# Altium PCB 2015_IHM.PcbDoc
Units mil, origin at the board's own origin, x right, y up, seen from the top; angles counter-clockwise.
Board outline 3543.31 x 2165.35 mil, 4 copper layers (1-TOP, 2-GND, 3-SIGNAL, 4-BOT); 228 components, 141 nets, 804 pads, 90 vias.
Unrouted connection lines stored in the file: 465.
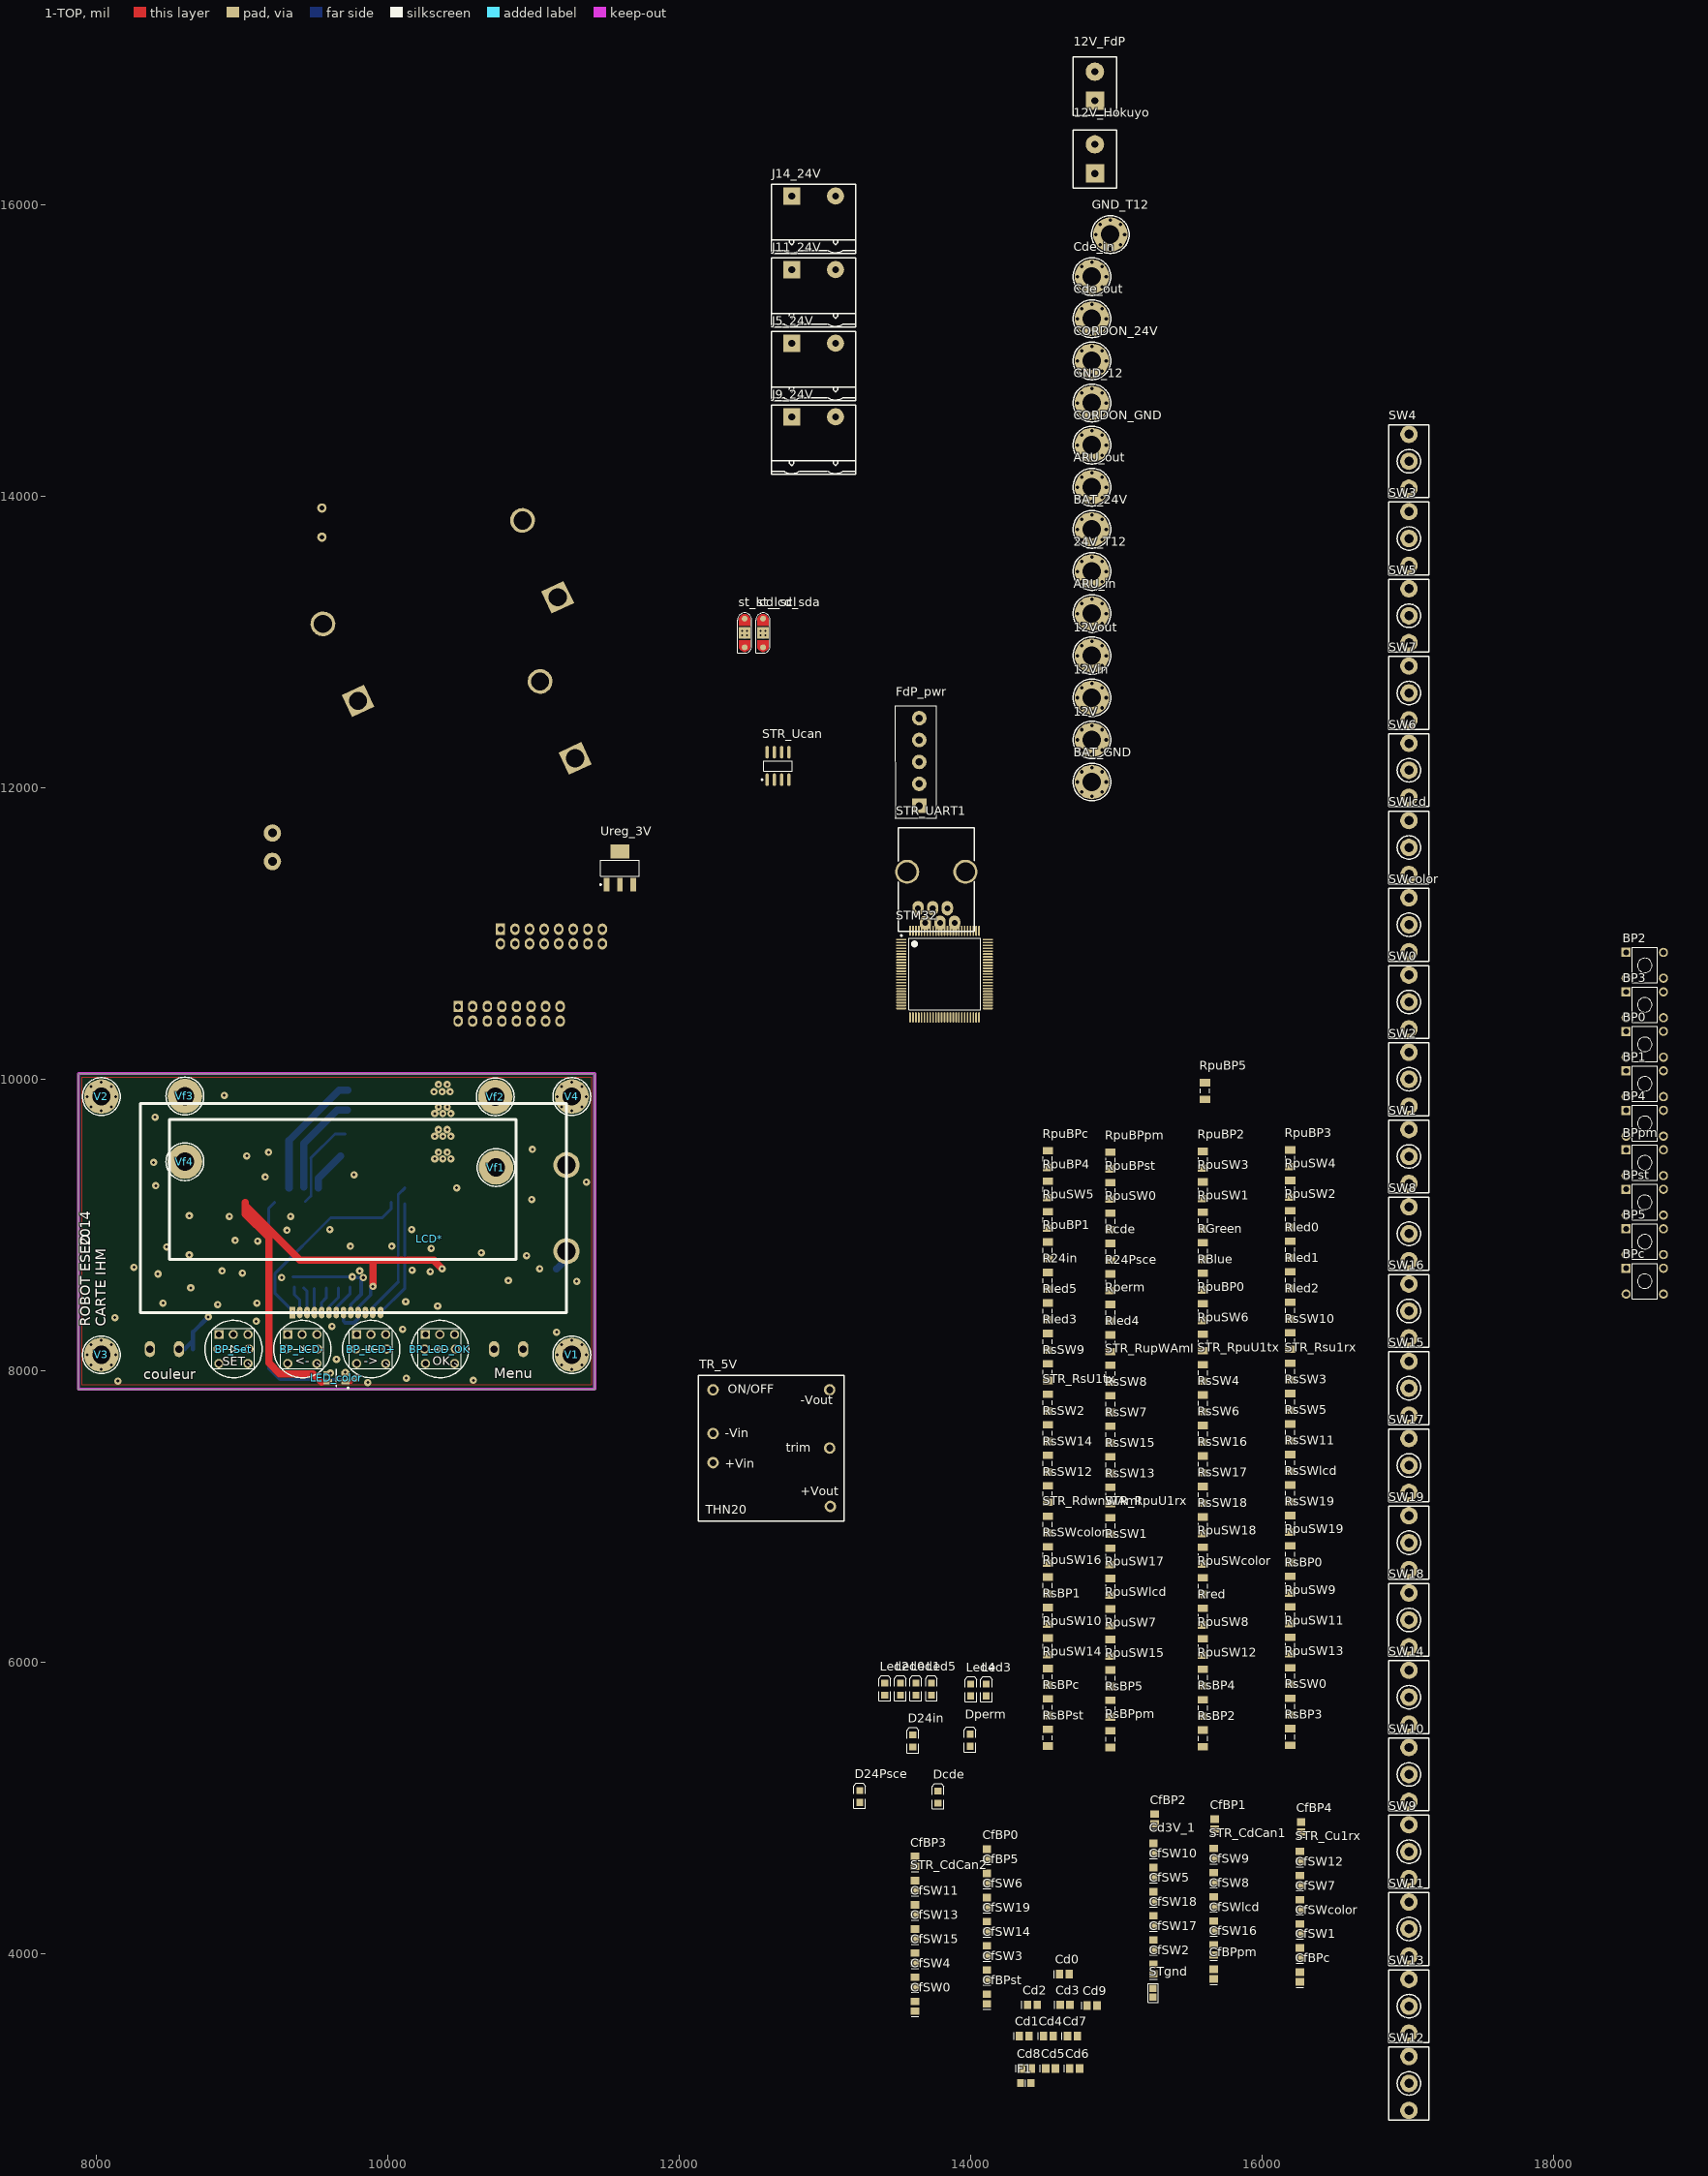
[diagram p0: 1-TOP view]
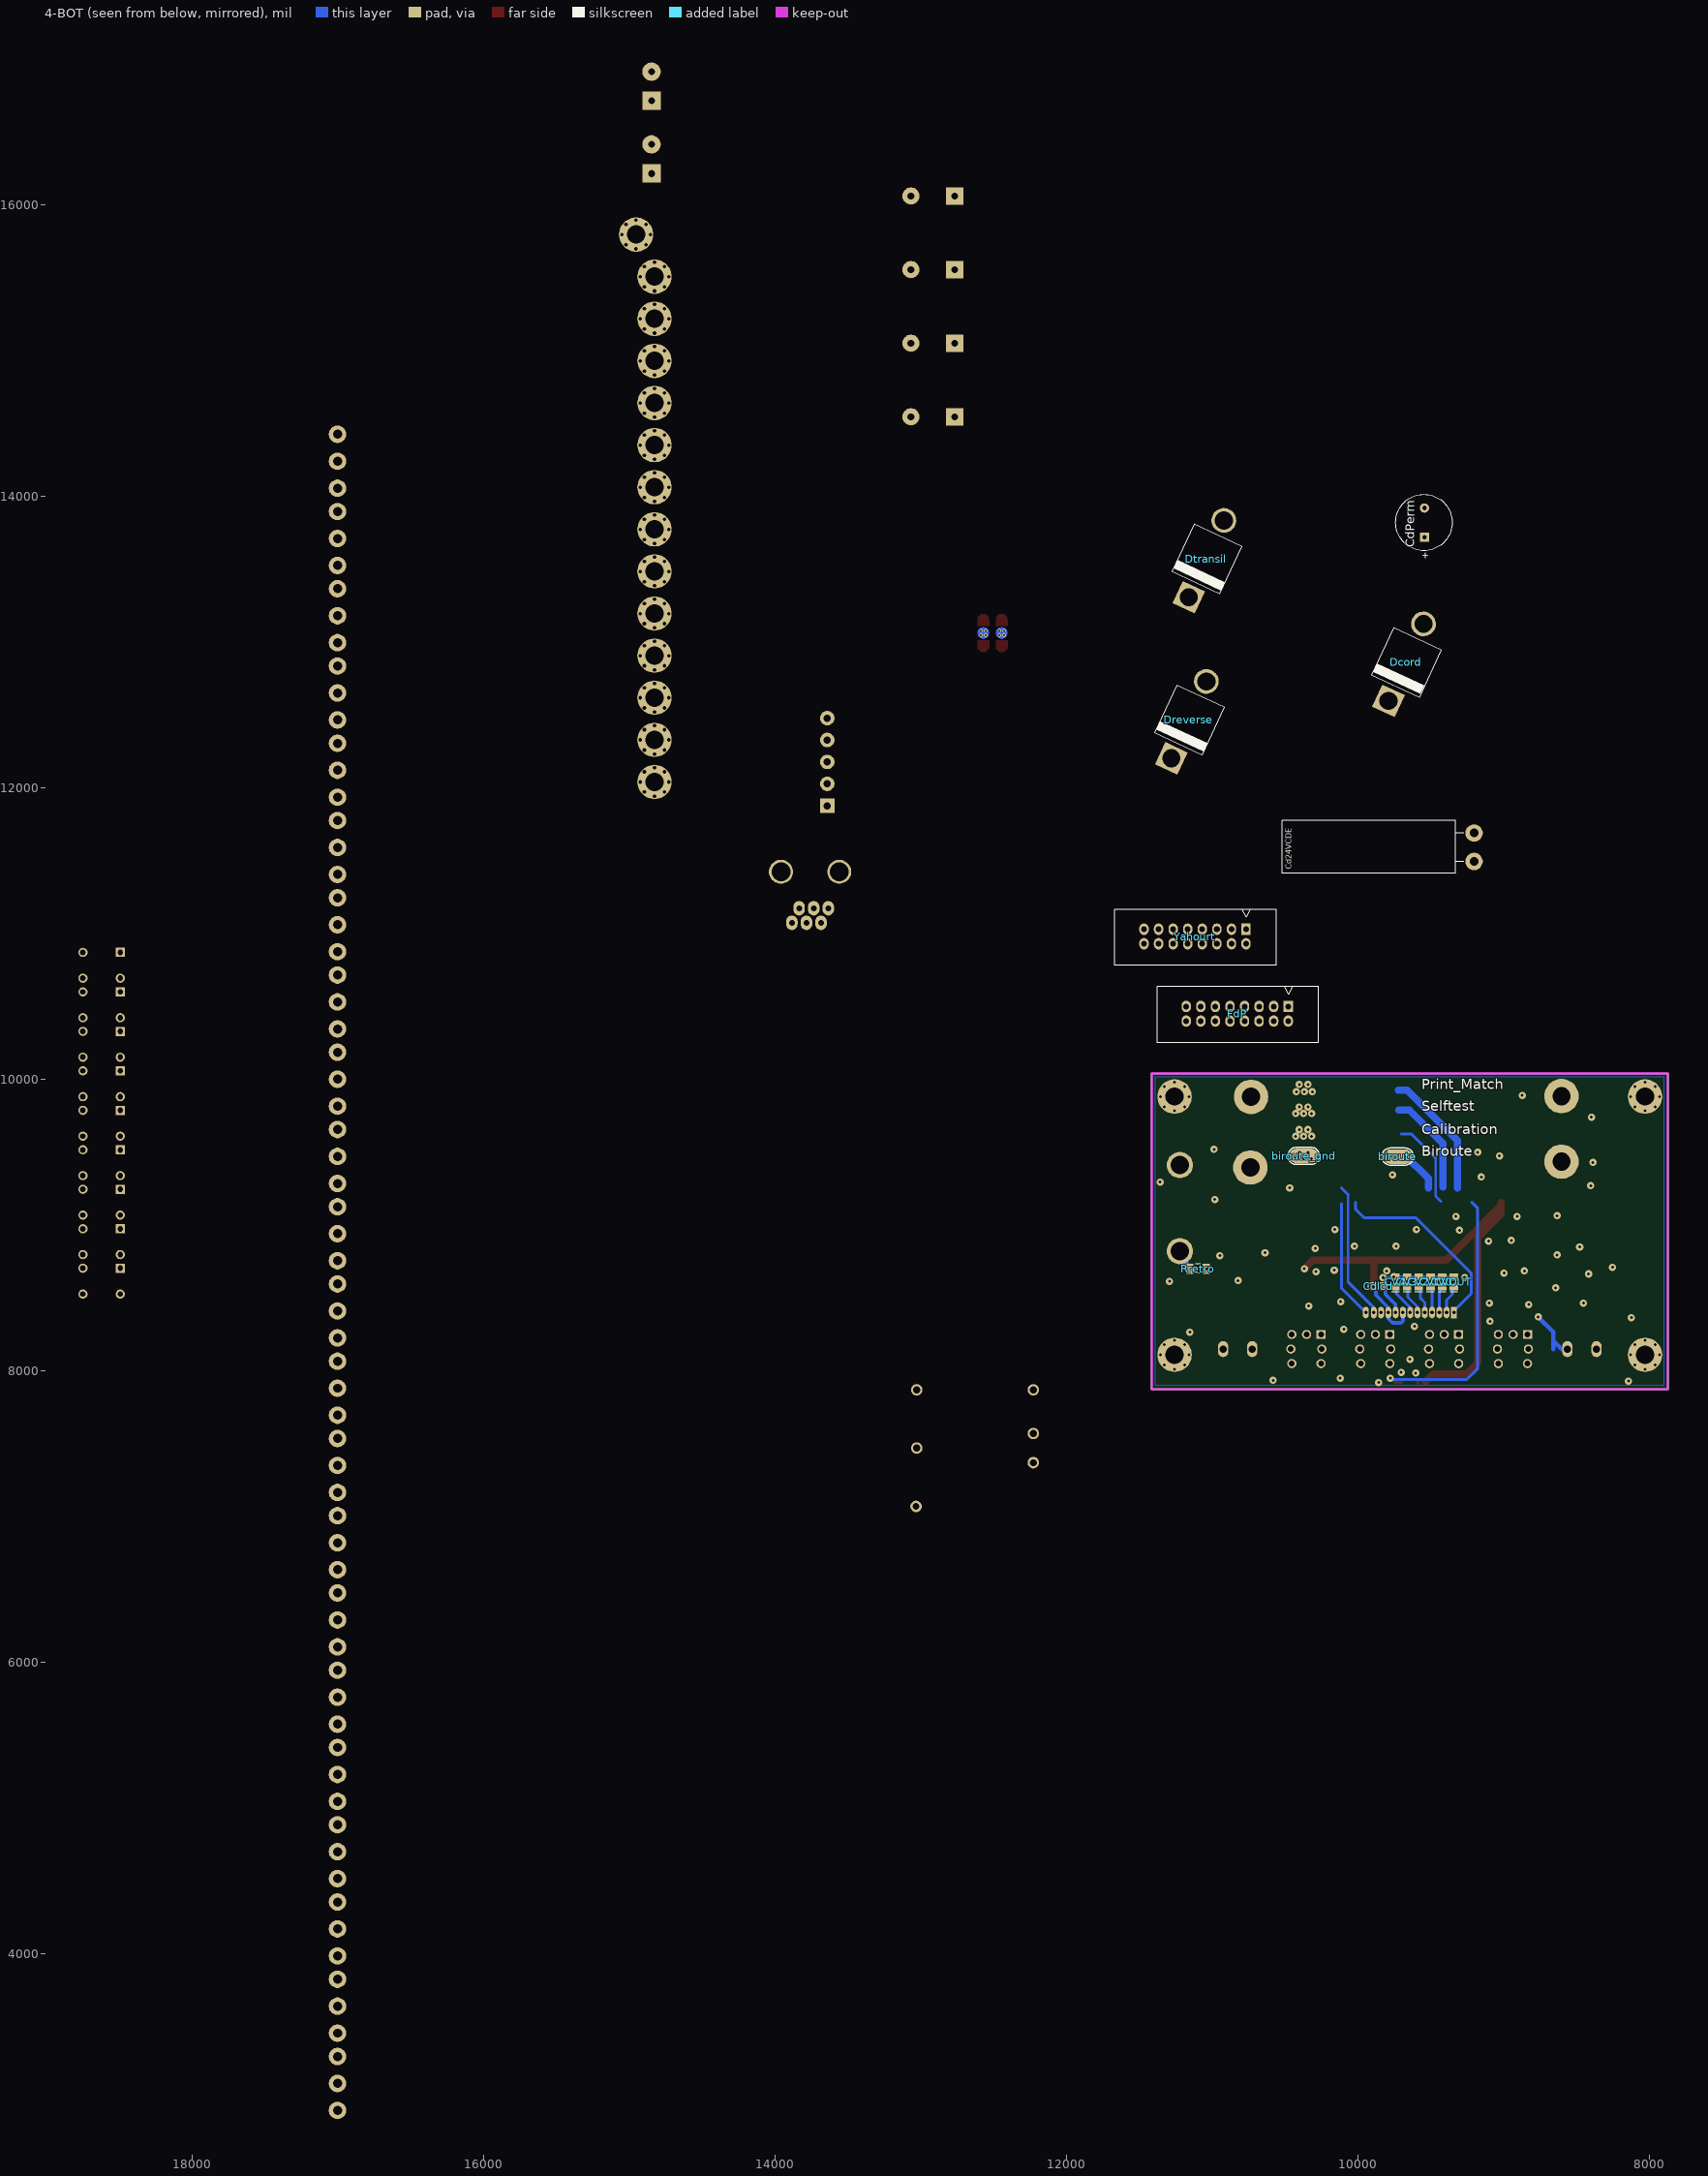
[diagram p1: 4-BOT view, seen from below]
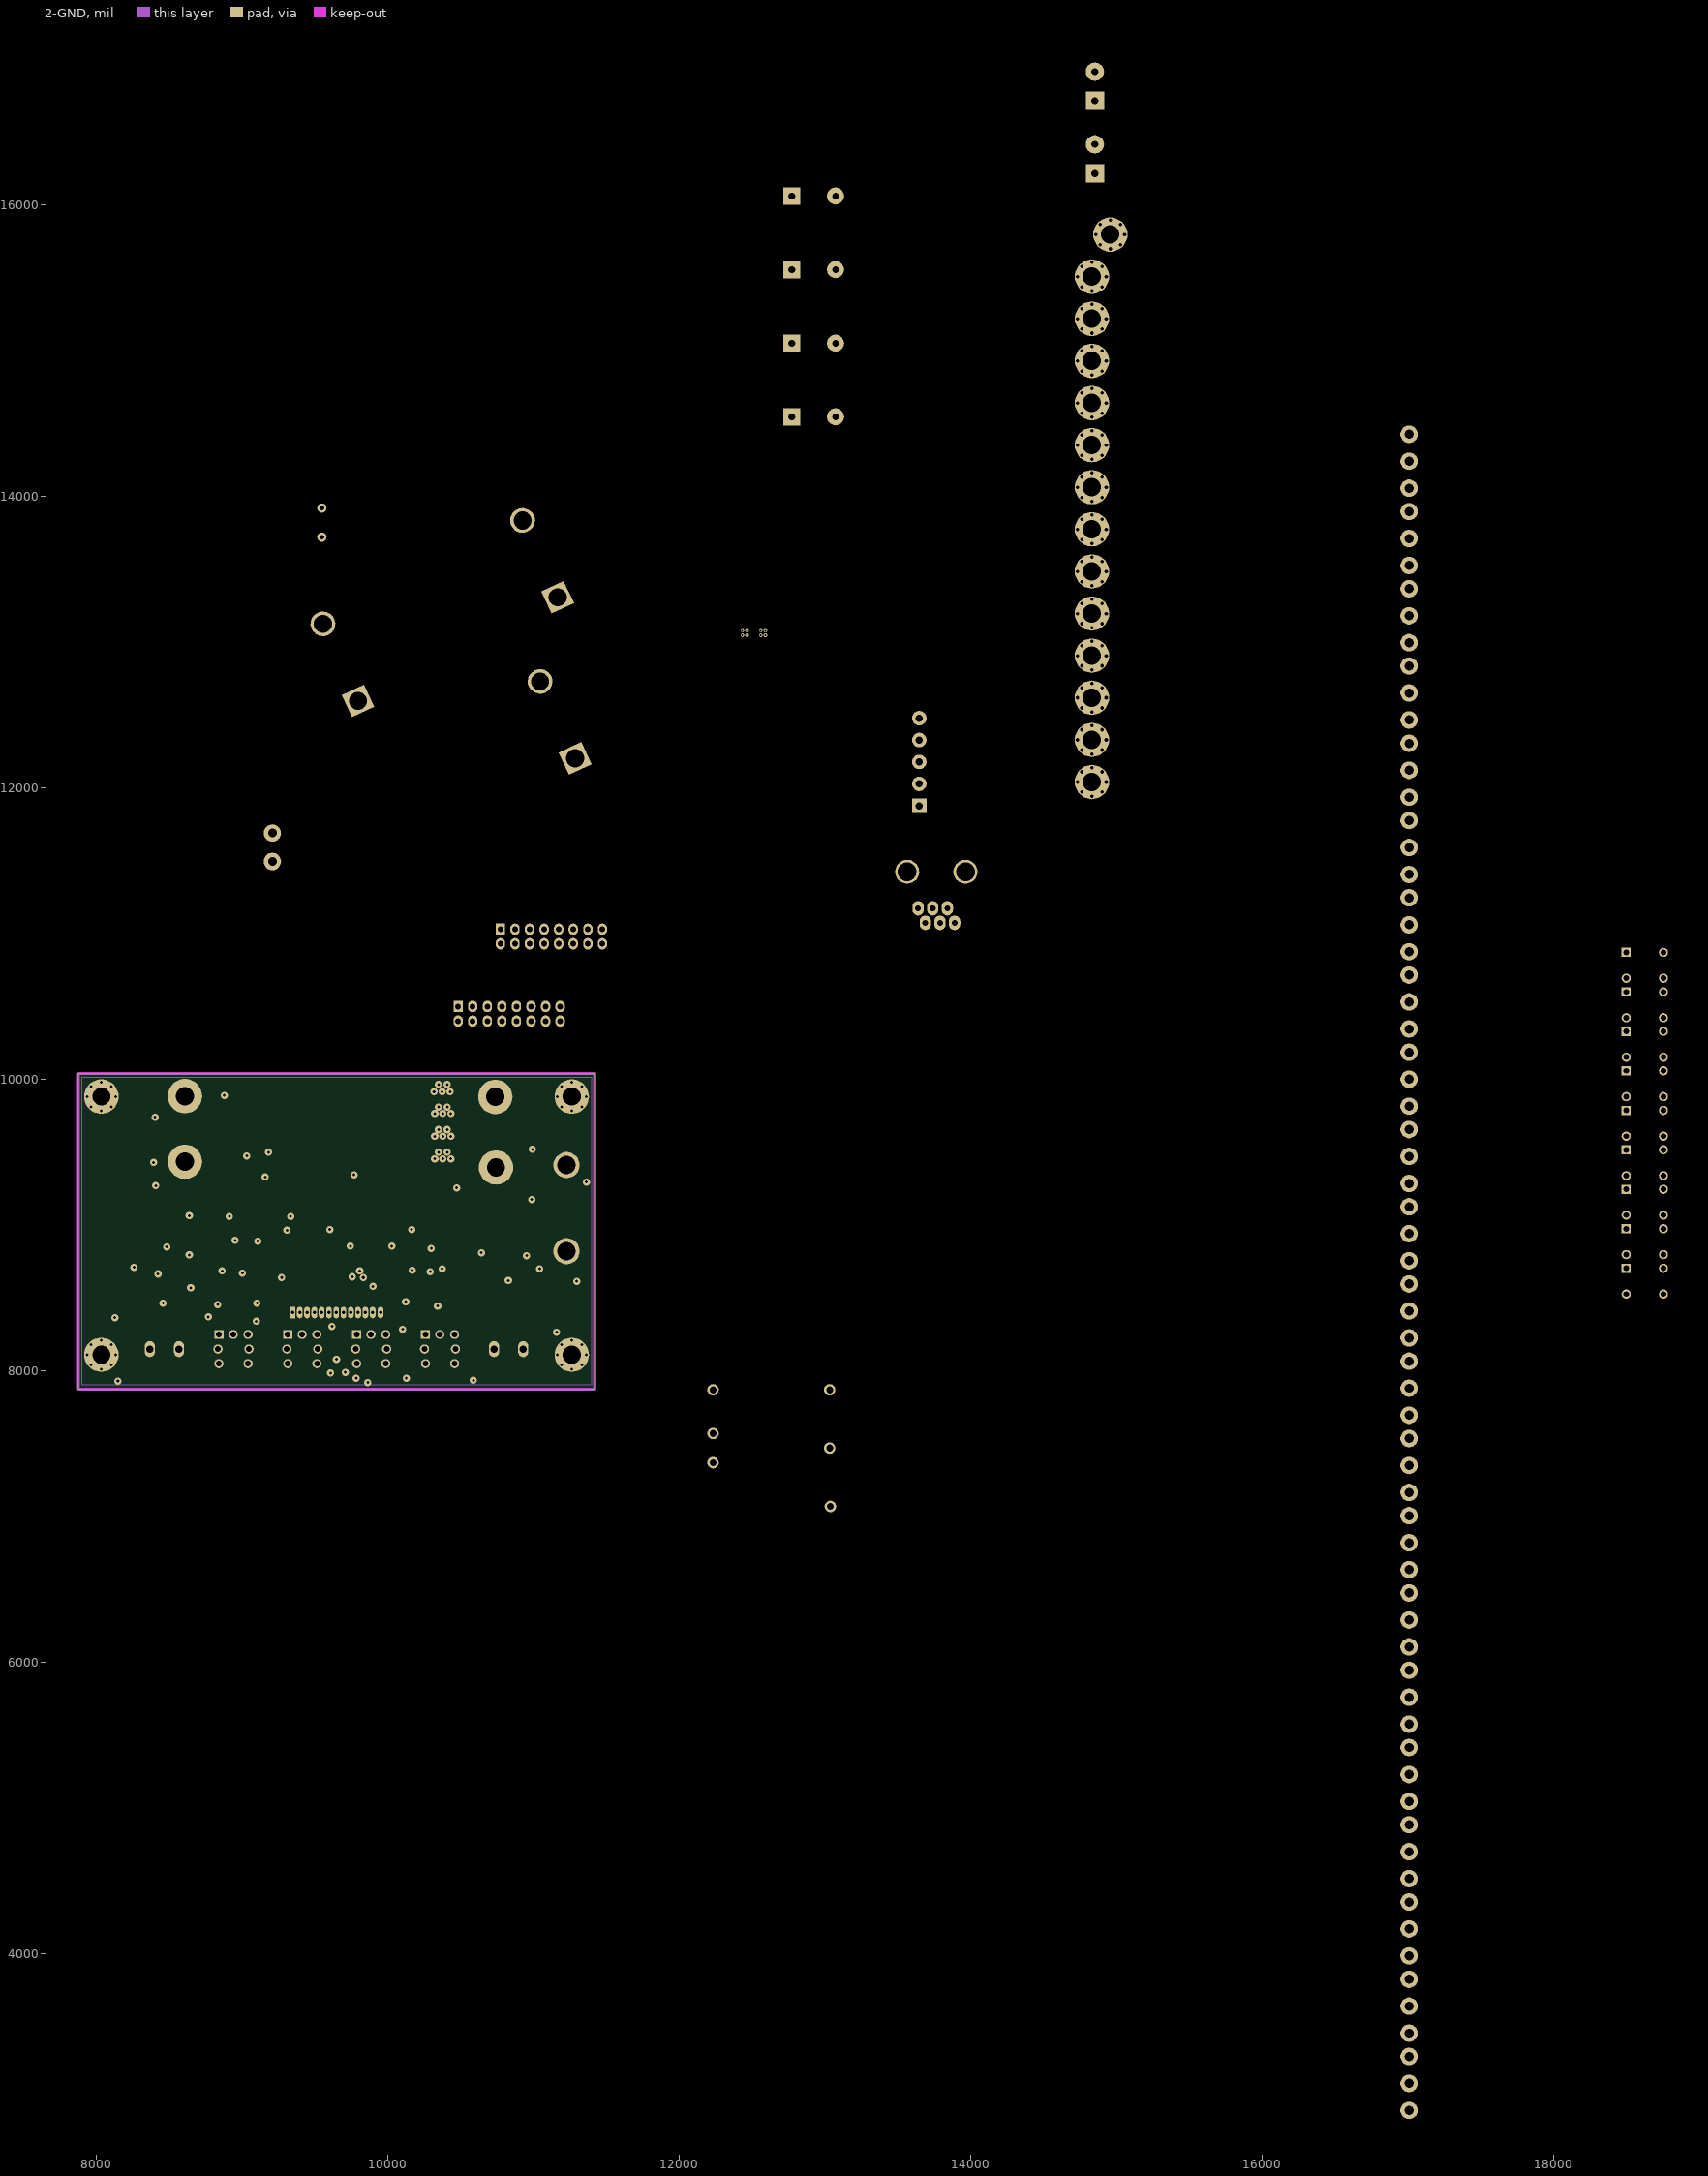
[diagram p2: 2-GND]
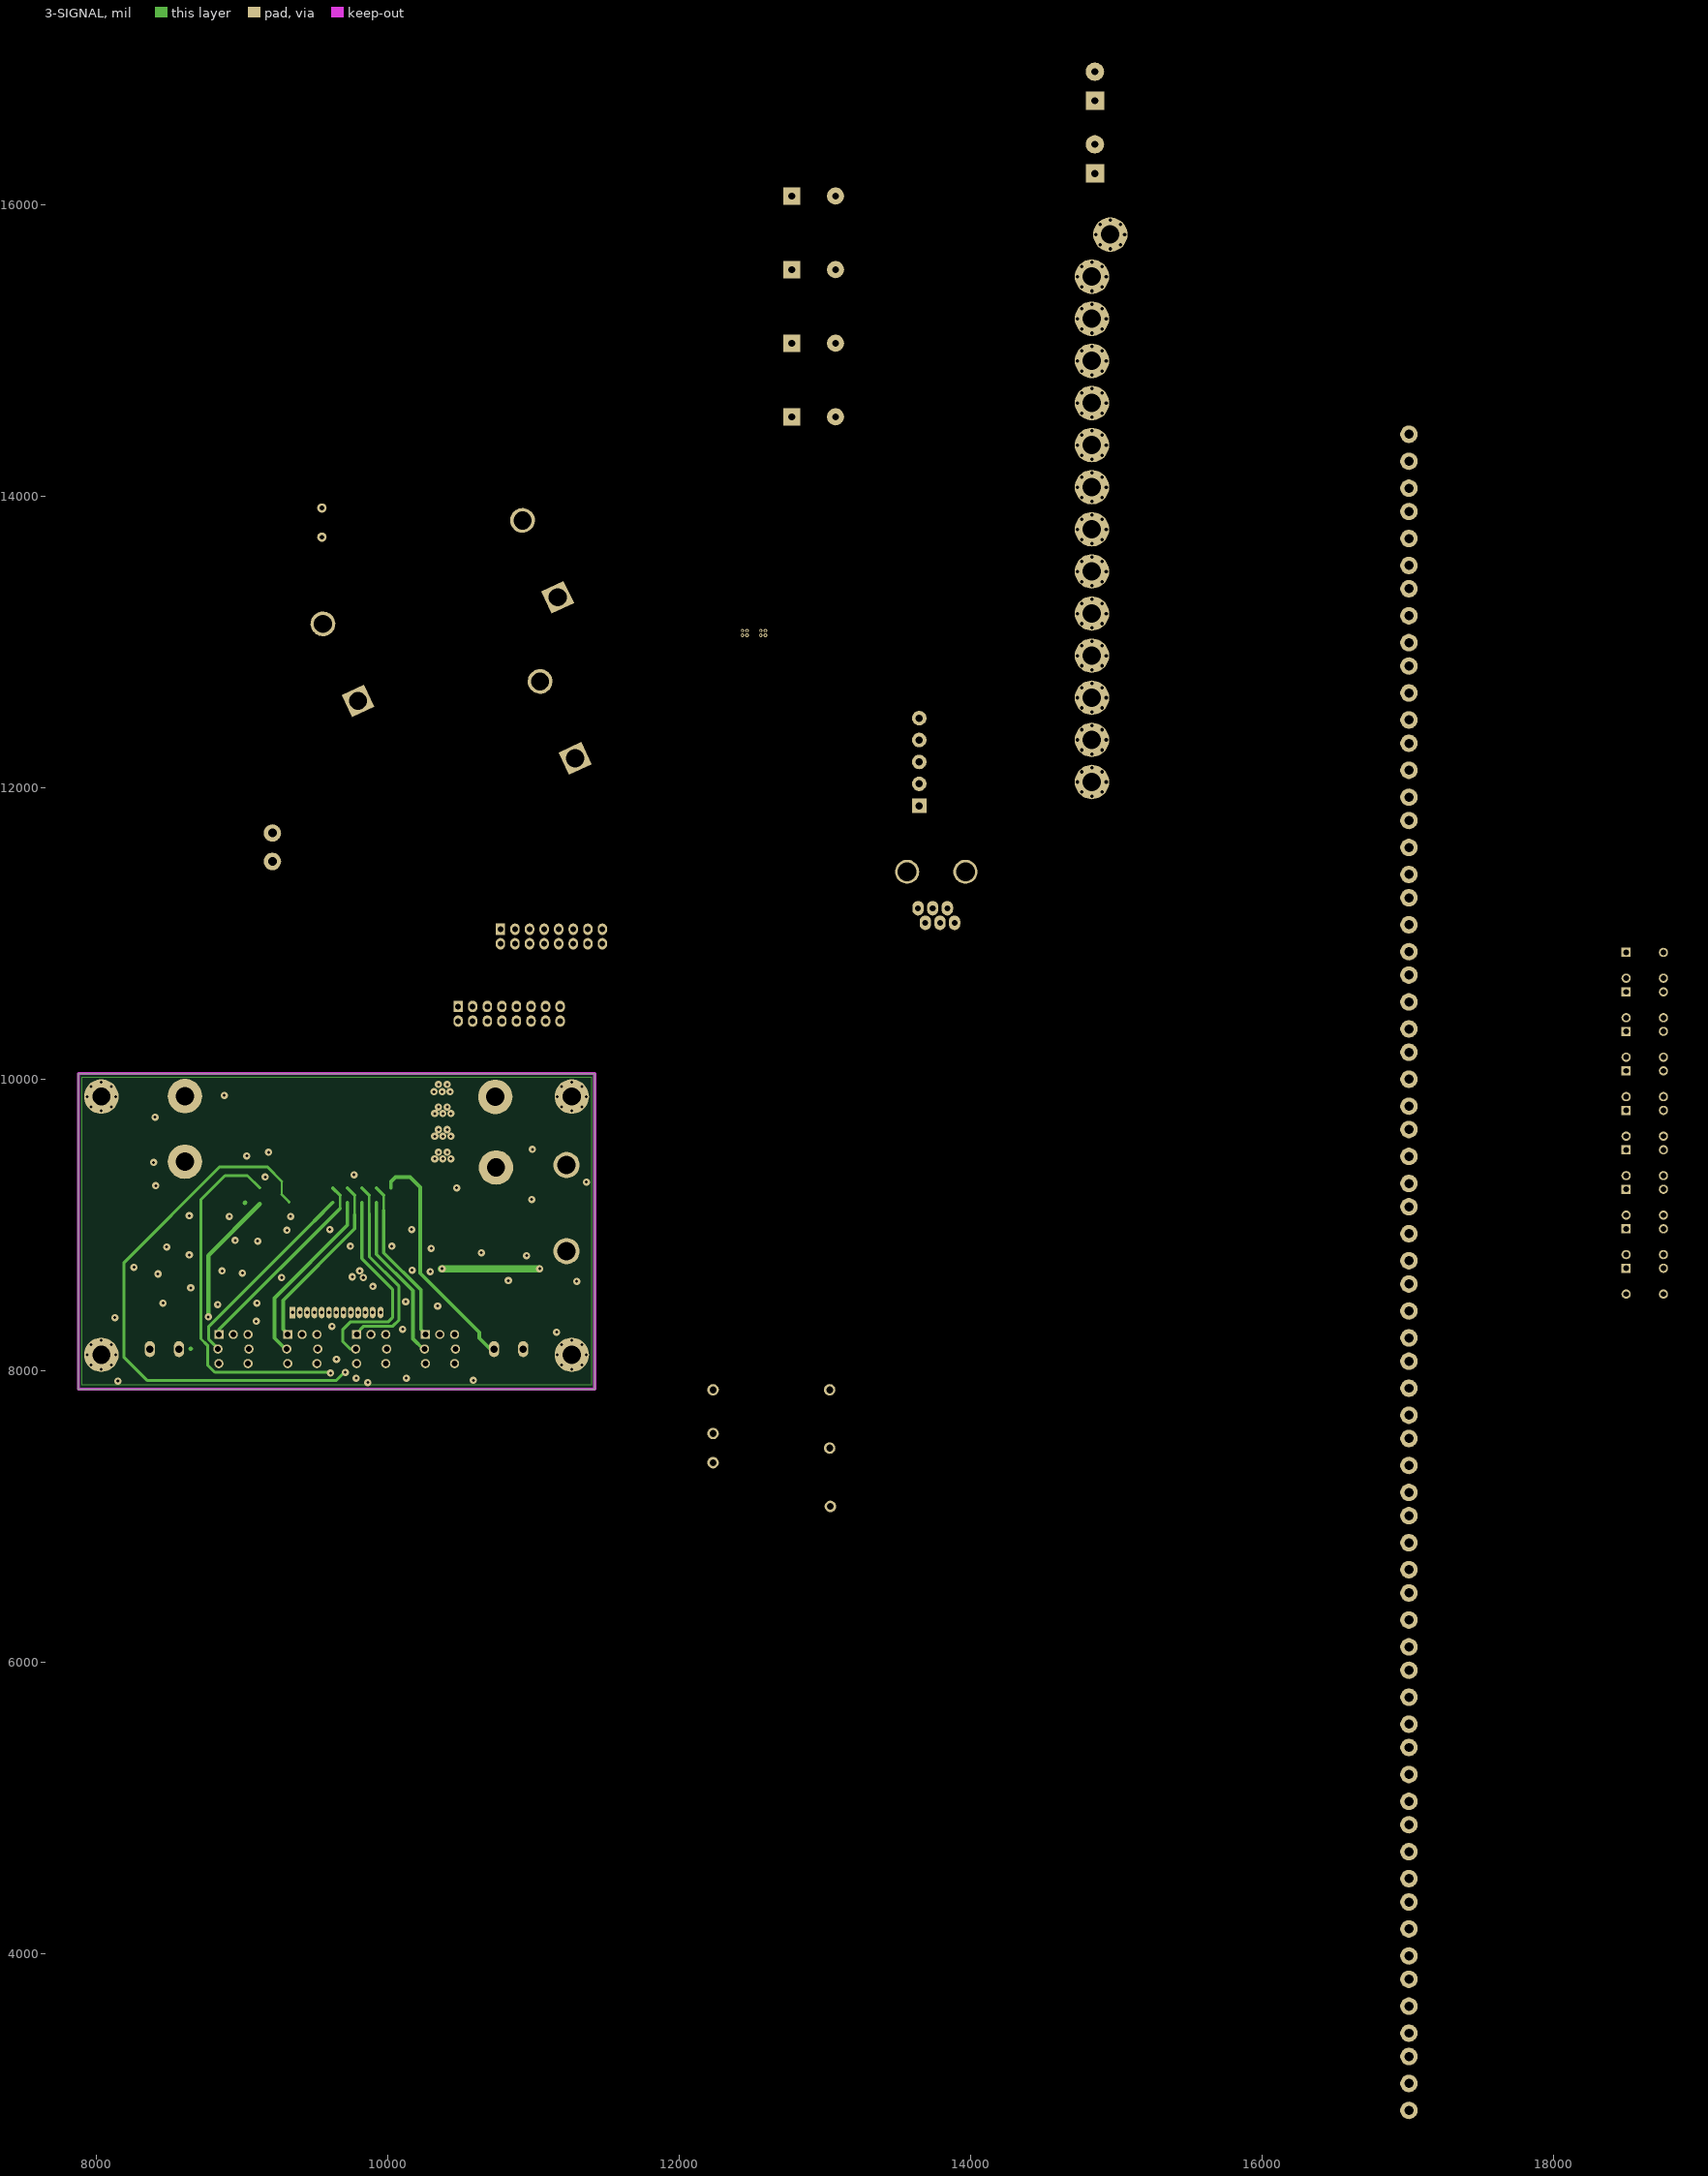
[diagram p3: 3-SIGNAL]

## Layer stack, top to bottom
Top Solder: solder mask 0.4, Solder Resist, Dk 3.5
1-TOP: signal copper 1.4
Dielectric1: core 12.6, FR-4, Dk 4.8
2-GND: signal copper 1.4
Dielectric2: prepreg 12.6, FR-4, Dk 4.8
3-SIGNAL: signal copper 1.4
Dielectric3: core 12.6, FR-4, Dk 4.8
4-BOT: signal copper 1.4
Bottom Solder: solder mask 0.4, Solder Resist, Dk 3.5

## Board outline
7874.02,7874.02 11417.32,7874.02 11417.32,10039.37 7874.02,10039.37

## Design rules (kind name [scope] priority, off if disabled: settings)
Clearance Clearance_1 [InNamedPolygon('2-GND') Or  InNamedPolygon('3-GND') Or  InNamedPolygon('1-GND') Or  InNamedPolygon('4-GND')] p1: gap=10
Clearance [All] p2: gap=8
FabricationTestpoint [(IsPad And (OnTopLayer Or OnBottomLayer))] p1: side=3 testpointundercomponent=TRUE minsize=40 maxsize=100 preferedsize=60 minholesize=0 maxholesize=40 preferedholesize=32 testpointgrid=1 allowsidetop=TRUE allowsidebottom=TRUE usegrid=TRUE gridtolerance=0.01
HoleSize [All] p1: absolutevalues=TRUE maxlimit=200 minlimit=1 maxpercent=80.000 minpercent=20.000
PlaneConnect [All] p1: planeconnectstyle=Direct reliefexpansion=20 reliefentries=4 reliefconductorwidth=10 reliefairgap=10
PolygonConnect [All] p1: connectstyle=Direct reliefconductorwidth=10 reliefentries=4 polygonreliefangle="90 Angle" airgapwidth=10
RoomDefinition 2015_IHM [InComponentClass('2015_IHM')] p1: confinementstyle=ConfineIn formatcopy=TRUE lockcomponents=FALSE outline 12644.37,8475 12114.37,8475 12114.37,9025 12644.37,9025
RoutingVias [All] p1: holewidth=28 width=50 viastyle="Through Hole" minholewidth=28 minwidth=50 maxholewidth=28 maxwidth=50
SilkToSolderMaskClearance SilkscreenOverComponentPads [IsPad] p1: minsilkscreentomaskgap=10 clearancetoexposedcopper=TRUE
SolderMaskExpansion [All] p1: expansion=4
Width [All] p1: maxlimit=200 minlimit=10 preferedwidth=15
25 further rules are at their usual default settings.

## Components (designator, comment, footprint, x,y, rotation, side; value= is the part's Value field where it differs from the comment)
12V "Pad_M3" M3x6mm#1 14828.83,12329.25 r0 top
12V_FdP "BORNIER2" BORNIER2 14849.37,16713.76 r90 top
12V_Hokuyo "BORNIER2" BORNIER2 14849.37,16215.02 r90 top
12Vin "Pad_M3" M3x6mm#1 14828.83,12618.17 r0 top
12Vout "Pad_M3" M3x6mm#1 14828.83,12907.09 r0 top
24V_T12 "Pad_M3" M3x6mm#1 14828.83,13484.92 r90 top
ARU_in "Pad_M3" M3x6mm#1 14828.83,13196 r0 top
ARU_out "Pad_M3" M3x6mm#1 14828.83,14062.75 r90 top
BAT_24V "Pad_M3" M3x6mm#1 14828.83,13773.84 r90 top
BAT_GND "Pad_M3" M3x6mm#1 14828.83,12040.34 r90 top
biroute "Pad_M3" PAD_CMS_5.08x2.54 9728.37,9470 r0 bottom
biroute_gnd "Pad_M3" PAD_CMS_5.08x2.54 10373.37,9475 r0 bottom
BP0 "BP?" "Switch 6x6 Vertical" 18494.87,10329.24 r0 top
BP1 "BP?" "Switch 6x6 Vertical" 18494.87,10058.36 r0 top
BP2 "BP?" "Switch 6x6 Vertical" 18494.87,10870.99 r0 top
BP3 "BP?" "Switch 6x6 Vertical" 18494.87,10600.11 r0 top
BP4 "BP?" "Switch 6x6 Vertical" 18494.87,9787.49 r0 top
BP5 "BP?" "Switch 6x6 Vertical" 18494.87,8974.87 r0 top
BP_LCD+ "pushbutton_led" PUSHBUTTON_LED_FlecheDroite 9783.07,8249.61 r0 top
BP_LCD- "pushbutton_led" PUSHBUTTON_LED_FlecheGauche 9310.63,8249.61 r0 top
BP_LCD_OK "pushbutton_led" PUSHBUTTON_LED_OK 10255.51,8249.61 r0 top
BP_Set "pushbutton_led" PUSHBUTTON_LED_SET 8838.19,8249.61 r0 top
BPc "BP?" "Switch 6x6 Vertical" 18494.87,8703.99 r0 top
BPpm "BP?" "Switch 6x6 Vertical" 18494.87,9516.62 r0 top
BPst "BP?" "Switch 6x6 Vertical" 18494.87,9245.74 r0 top
Cd0 "100nF" C0805_N 14640,3860 r0 top
Cd1 "100nF" C0805_N 14364.17,3436.42 r0 top
Cd2 "100nF" C0805_N 14420,3650 r0 top
Cd3 "100nF" C0805_N 14645,3650 r0 top
Cd3V_1 "4.7u" C0805_N 15251.06,4724.25 r90 top
Cd4 "100nF" C0805_N 14529.84,3436.42 r0 top
Cd5 "1nF" C0805_N 14544.84,3213.74 r0 top
Cd6 "1nF" C0805_N 14710.51,3213.74 r0 top
Cd7 "1nF" C0805_N 14695.51,3436.42 r0 top
Cd8 "1nF" C0805_N 14379.17,3213.74 r0 top
Cd9 "1nF" C0805_N 14830,3645 r0 top
Cd24VCDE "1000uF" RESISTANCE_5W 9205,11590 r0 bottom
Cde_in "Pad_M3" M3x6mm#1 14828.83,15507.34 r0 top
Cde_out "Pad_M3" M3x6mm#1 14828.83,15218.42 r90 top
Cdlcd "10uF" C0805_N 9859.37,8580 r180 bottom
CdPerm "100uF" CONDENSATEUR_POLARISE_ELECTROLYTIQUE_RADIAL_5.08/8.9 9545,13720 r90 bottom
CfBP0 "100nF" C0805_N 14108.39,4684.25 r90 top
CfBP1 "100nF" C0805_N 15671.61,4890.36 r90 top
CfBP2 "100nF" C0805_N 15258.94,4925.36 r90 top
CfBP3 "100nF" C0805_N 13615.71,4634.25 r90 top
CfBP4 "100nF" C0805_N 16264.29,4870.36 r90 top
CfBP5 "100nF" C0805_N 14108.39,4518.58 r90 top
CfBPc "100nF" C0805_N 16256.42,3840.91 r90 top
CfBPpm "100nF" C0805_N 15663.74,3860.91 r90 top
CfBPst "100nF" C0805_N 14108.39,3690.24 r90 top
CfSW0 "100nF" C0805_N 13615.71,3640.24 r90 top
CfSW1 "100nF" C0805_N 16256.42,4006.58 r90 top
CfSW2 "100nF" C0805_N 15251.06,3895.91 r90 top
CfSW3 "100nF" C0805_N 14108.39,3855.91 r90 top
CfSW4 "100nF" C0805_N 13615.71,3805.91 r90 top
CfSW5 "100nF" C0805_N 15251.06,4392.91 r90 top
CfSW6 "100nF" C0805_N 14108.39,4352.91 r90 top
CfSW7 "100nF" C0805_N 16256.42,4337.91 r90 top
CfSW8 "100nF" C0805_N 15663.74,4357.91 r90 top
CfSW9 "100nF" C0805_N 15663.74,4523.58 r90 top
CfSW10 "100nF" C0805_N 15251.06,4558.58 r90 top
CfSW11 "100nF" C0805_N 13615.71,4302.91 r90 top
CfSW12 "100nF" C0805_N 16256.42,4503.58 r90 top
CfSW13 "100nF" C0805_N 13615.71,4137.24 r90 top
CfSW14 "100nF" C0805_N 14108.39,4021.58 r90 top
CfSW15 "100nF" C0805_N 13615.71,3971.58 r90 top
CfSW16 "100nF" C0805_N 15663.74,4026.58 r90 top
CfSW17 "100nF" C0805_N 15251.06,4061.58 r90 top
CfSW18 "100nF" C0805_N 15251.06,4227.24 r90 top
CfSW19 "100nF" C0805_N 14108.39,4187.24 r90 top
CfSWcolor "100nF" C0805_N 16256.42,4172.24 r90 top
CfSWlcd "100nF" C0805_N 15663.74,4192.24 r90 top
CORDON_24V "Pad_M3" M3x6mm#1 14828.83,14929.5 r90 top
CORDON_GND "Pad_M3" M3x6mm#1 14828.83,14351.67 r90 top
CV0 "1uF" C0805_N 9424.37,8610 r90 bottom
CV1 "1uF" C0805_N 9504.37,8610 r90 bottom
CV2 "1uF" C0805_N 9584.37,8610 r90 bottom
CV3 "1uF" C0805_N 9664.37,8610 r90 bottom
CV4 "1uF" C0805_N 9744.37,8610 r90 bottom
CVOUT "1uF" C0805_N 9344.37,8610 r90 bottom
D24in "LED" LED_0805 13600,5460 r90 top
D24Psce "LED" LED_0805 13235,5080 r90 top
Dcde "LED" LED_0805 13772.68,5074.76 r90 top
Dcord "Diode" DIO10.46-5.3x2.8 9670,12860 r295 bottom
Dperm "LED" LED_0805 13992.52,5465.87 r90 top
Dreverse "Diode 1N4001" DIO10.46-5.3x2.8 11160,12465 r295 bottom (schematic designator Dcord)
Dtransil "BZW50-12B" DIO10.46-5.3x2.8 11040,13570 r295 bottom (schematic designator Dcord)
F1 "Fusible_1A_Fast" R0805_N 14375.24,3113.03 r0 top
FdP "BARRETTE_8 CONTACTS_2 RANGEES_MALE_DROITE" "HE10/16_M_D_B P" 10480,10400 r0 bottom (schematic designator COMRF)
FdP_pwr "BORNIER_5V_3.81MM" BORNIER_5V_3.81MM 13643.82,11877.92 r90 top
GND_12 "Pad_M3" M3x6mm#1 14828.83,14640.59 r0 top
GND_T12 "Pad_M3" M3x6mm#1 14955.13,15796.25 r90 top
J5_24V "0 - 24V" BORNIER2_FEM_COUDE 12769.37,15050.87 r0 top
J9_24V "0 - 24V" BORNIER2_FEM_COUDE 12769.37,14545.87 r0 top
J11_24V "0 - 24V" BORNIER2_FEM_COUDE 12769.37,15555.87 r0 top
J14_24V "0 - 24V" BORNIER2_FEM_COUDE 12769.37,16060.87 r0 top
LCD* "MCCOG42005A6W-BNMLWI" LCD_4X20_MIDAS 8298.82,8400 r0 top locked
Led0 "LED" LED_0805 13514.29,5816.97 r90 top
Led1 "LED" LED_0805 13620.91,5816.97 r90 top
Led2 "LED" LED_0805 13407.68,5816.97 r90 top
Led3 "LED" LED_0805 14104.29,5810.87 r90 top
Led4 "LED" LED_0805 13997.68,5810.87 r90 top
Led5 "LED" LED_0805 13727.52,5816.97 r90 top
LED_color "150141M173100" 3528 9645.67,7952.76 r180 top
R24in "4.7k" R1206_N 14526.61,8617.56 r90 top
R24Psce "4.7k" R1206_N 14956.1,8607.56 r90 top
RBlue "150" R1206_N 15590.59,8612.56 r90 top
Rcde "1k" R1206_N 14956.1,8816.54 r90 top
RGreen "150" R1206_N 15590.59,8821.54 r90 top
Rled0 "150" R1206_N 16190.08,8831.54 r90 top
Rled1 "150" R1206_N 16190.08,8622.56 r90 top
Rled2 "150" R1206_N 16190.08,8413.58 r90 top
Rled3 "150" R1206_N 14526.61,8199.61 r90 top
Rled4 "150" R1206_N 14956.1,8189.61 r90 top
Rled5 "150" R1206_N 14526.61,8408.58 r90 top
Rperm "1k" R1206_N 14956.1,8398.58 r90 top
RpuBP0 "100K" R1206_N 15590.59,8403.58 r90 top
RpuBP1 "100K" R1206_N 14526.61,8826.54 r90 top
RpuBP2 "100K" R1206_N 15590.59,9448.47 r90 top
RpuBP3 "100K" R1206_N 16190.08,9458.47 r90 top
RpuBP4 "100K" R1206_N 14526.61,9244.49 r90 top
RpuBP5 "100K" R1206_N 15605,9920 r90 top
RpuBPc "100K" R1206_N 14526.61,9453.47 r90 top
RpuBPpm "100K" R1206_N 14956.1,9443.47 r90 top
RpuBPst "100K" R1206_N 14956.1,9234.49 r90 top
RpuSW0 "100K" R1206_N 14956.1,9025.51 r90 top
RpuSW1 "100K" R1206_N 15590.59,9030.51 r90 top
RpuSW2 "100K" R1206_N 16190.08,9040.51 r90 top
RpuSW3 "100K" R1206_N 15590.59,9239.49 r90 top
RpuSW4 "100K" R1206_N 16190.08,9249.49 r90 top
RpuSW5 "100K" R1206_N 14526.61,9035.51 r90 top
RpuSW6 "100K" R1206_N 15590.59,8194.61 r90 top
RpuSW7 "100K" R1206_N 14956.1,6099.84 r90 top
RpuSW8 "100K" R1206_N 15590.59,6104.84 r90 top
RpuSW9 "100K" R1206_N 16190.08,6323.82 r90 top
RpuSW10 "100K" R1206_N 14526.61,6109.84 r90 top
RpuSW11 "100K" R1206_N 16190.08,6114.84 r90 top
RpuSW12 "100K" R1206_N 15590.59,5895.87 r90 top
RpuSW13 "100K" R1206_N 16190.08,5905.87 r90 top
RpuSW14 "100K" R1206_N 14526.61,5900.87 r90 top
RpuSW15 "100K" R1206_N 14956.1,5890.87 r90 top
RpuSW16 "100K" R1206_N 14526.61,6527.8 r90 top
RpuSW17 "100K" R1206_N 14956.1,6517.8 r90 top
RpuSW18 "100K" R1206_N 15590.59,6731.77 r90 top
RpuSW19 "100K" R1206_N 16190.08,6741.77 r90 top
RpuSWcolor "100K" R1206_N 15590.59,6522.8 r90 top
RpuSWlcd "100K" R1206_N 14956.1,6308.82 r90 top
Rred "150" R1206_N 15590.59,6313.82 r90 top
Rretro "33R" R1206_N 11099.37,8700 r180 bottom
RsBP0 "1K" R1206_N 16190.08,6532.8 r90 top
RsBP1 "1K" R1206_N 14526.61,6318.82 r90 top
RsBP2 "1K" R1206_N 15590.59,5477.91 r90 top
RsBP3 "1K" R1206_N 16190.08,5487.91 r90 top
RsBP4 "1K" R1206_N 15590.59,5686.89 r90 top
RsBP5 "1K" R1206_N 14956.1,5681.89 r90 top
RsBPc "1K" R1206_N 14526.61,5691.89 r90 top
RsBPpm "1K" R1206_N 14956.1,5472.91 r90 top
RsBPst "1K" R1206_N 14526.61,5482.91 r90 top
RsSW0 "1K" R1206_N 16190.08,5696.89 r90 top
RsSW1 "1K" R1206_N 14956.1,6726.77 r90 top
RsSW2 "1K" R1206_N 14526.61,7572.68 r90 top
RsSW3 "1K" R1206_N 16190.08,7786.65 r90 top
RsSW4 "1K" R1206_N 15590.59,7776.65 r90 top
RsSW5 "1K" R1206_N 16190.08,7577.68 r90 top
RsSW6 "1K" R1206_N 15590.59,7567.68 r90 top
RsSW7 "1K" R1206_N 14956.1,7562.68 r90 top
RsSW8 "1K" R1206_N 14956.1,7771.65 r90 top
RsSW9 "1K" R1206_N 14526.61,7990.63 r90 top
RsSW10 "1K" R1206_N 16190.08,8204.61 r90 top
RsSW11 "1K" R1206_N 16190.08,7368.7 r90 top
RsSW12 "1K" R1206_N 14526.61,7154.73 r90 top
RsSW13 "1K" R1206_N 14956.1,7144.73 r90 top
RsSW14 "1K" R1206_N 14526.61,7363.7 r90 top
RsSW15 "1K" R1206_N 14956.1,7353.7 r90 top
RsSW16 "1K" R1206_N 15590.59,7358.7 r90 top
RsSW17 "1K" R1206_N 15590.59,7149.73 r90 top
RsSW18 "1K" R1206_N 15590.59,6940.75 r90 top
RsSW19 "1K" R1206_N 16190.08,6950.75 r90 top
RsSWcolor "1K" R1206_N 14526.61,6736.77 r90 top
RsSWlcd "1K" R1206_N 16190.08,7159.73 r90 top
st_lcd_scl "Goutte Strap_3" "Goutte Strap_3 PADS" 12446.06,13062.44 r90 top
st_lcd_sda "Goutte Strap_3" "Goutte Strap_3 PADS" 12572.36,13062.44 r90 top
STgnd "Goutte Strap_2" "Goutte Strap_2 Pads_Clearance 0.254mm" 15248.66,3702.17 r90 top
STM32 "STM32F407VGT6" STM-LQFP100_N 13817.87,10722.36 r0 top
STR_CdCan1 "100nF" C0805_N 15663.74,4689.25 r90 top
STR_CdCan2 "1µF" C0805_N 13615.71,4468.58 r90 top
STR_Cu1rx "100pF" C0805_N 16256.42,4669.25 r90 top
STR_RdwnWAmI "0" R1206_N 14526.61,6945.75 r90 top
STR_RpuU1rx "10k" R1206_N 14956.1,6935.75 r90 top
STR_RpuU1tx "1M" R1206_N 15590.59,7985.63 r90 top
STR_Rsu1rx "1k" R1206_N 16190.08,7995.63 r90 top
STR_RsU1tx "100" R1206_N 14526.61,7781.65 r90 top
STR_RupWAmI "0" R1206_N 14956.1,7980.63 r90 top
STR_UART1 "RJ11_6/6" RJ11_6/6 13686.24,11074.17 r90 top
STR_Ucan "MCP2551-I/SN" SO8_N 12675,12150 r90 top
SW0 "25436NAH" "SW_UNIPOL_DROIT - APEM 18235" 16864.37,10280.87 r0 top
SW1 "25436NAH" "SW_UNIPOL_DROIT - APEM 18235" 16864.37,9220.87 r0 top
SW2 "25436NAH" "SW_UNIPOL_DROIT - APEM 18235" 16864.37,9750.87 r0 top
SW3 "25436NAH" "SW_UNIPOL_DROIT - APEM 18235" 16864.37,13460.87 r0 top
SW4 "25436NAH" "SW_UNIPOL_DROIT - APEM 18235" 16864.37,13990.87 r0 top
SW5 "25436NAH" "SW_UNIPOL_DROIT - APEM 18235" 16864.37,12930.87 r0 top
SW6 "25436NAH" "SW_UNIPOL_DROIT - APEM 18235" 16864.37,11870.87 r0 top
SW7 "25436NAH" "SW_UNIPOL_DROIT - APEM 18235" 16864.37,12400.87 r0 top
SW8 "25436NAH" "SW_UNIPOL_DROIT - APEM 18235" 16864.37,8690.87 r0 top
SW9 "25436NAH" "SW_UNIPOL_DROIT - APEM 18235" 16864.37,4450.87 r0 top
SW10 "25436NAH" "SW_UNIPOL_DROIT - APEM 18235" 16864.37,4980.87 r0 top
SW11 "25436NAH" "SW_UNIPOL_DROIT - APEM 18235" 16864.37,3920.87 r0 top
SW12 "25436NAH" "SW_UNIPOL_DROIT - APEM 18235" 16864.37,2860.87 r0 top
SW13 "25436NAH" "SW_UNIPOL_DROIT - APEM 18235" 16864.37,3390.87 r0 top
SW14 "25436NAH" "SW_UNIPOL_DROIT - APEM 18235" 16864.37,5510.87 r0 top
SW15 "25436NAH" "SW_UNIPOL_DROIT - APEM 18235" 16864.37,7630.87 r0 top
SW16 "25436NAH" "SW_UNIPOL_DROIT - APEM 18235" 16864.37,8160.87 r0 top
SW17 "25436NAH" "SW_UNIPOL_DROIT - APEM 18235" 16864.37,7100.87 r0 top
SW18 "25436NAH" "SW_UNIPOL_DROIT - APEM 18235" 16864.37,6040.87 r0 top
SW19 "25436NAH" "SW_UNIPOL_DROIT - APEM 18235" 16864.37,6570.87 r0 top
SWcolor "25436NAH" "SW_UNIPOL_DROIT - APEM 18235" 16864.37,10810.87 r0 top
SWlcd "25436NAH" "SW_UNIPOL_DROIT - APEM 18235" 16864.37,11340.87 r0 top
TR_5V "TRACO THN 20-4811Wi" TRACO_THN20 12129.37,7970 r0 top
Ureg_3V "MCP1826S-3302E/DB" SOT223-4N 11590,11450 r90 top
V1 "Pad_M3" M3x6mm#2 11259.84,8110.24 r0 top locked
V2 "Pad_M3" M3x6mm#2 8031.5,9881.89 r0 top locked
V3 "Pad_M3" M3x6mm#2 8031.5,8110.24 r0 top locked
V4 "Pad_M3" M3x6mm#2 11259.84,9881.89 r0 top locked
Vf1 "Pad_M3" M3x6mm#3 10740,9395 r0 top
Vf2 "Pad_M3" M3x6mm#3 10735,9880 r0 top
Vf3 "Pad_M3" M3x6mm#3 8605,9885 r0 top
Vf4 "Pad_M3" M3x6mm#3 8605,9435 r0 top
Yahourt "BARRETTE_8 CONTACTS_2 RANGEES_MALE_DROITE" "HE10/16_M_D_B P" 10770,10930 r0 bottom (schematic designator COMRF)

## Footprints (in the part's own frame and the unit in brackets; to place one, negate y for a bottom-side part, rotate by r counter-clockwise, add the part's x,y. Pads: shape width x height; smd on the part's side, far side on the other; paste and mask are expansions set on the pad)
3528 [mm] "Chip LED, 4-Leads, Body 2.8x3.5mm (max), Pitch 1.42mm, IPC Medium Density"
  rect 1.5x0.9 smd: 1(1.55,0.707) 2(1.55,-0.71) 3(-1.55,0.707) 4(-1.55,-0.707)
  silkscreen extent -2.16,-1.5 0.03,1.9, body extent -1.75,-1.4 1.75,1.4, height 1.87
BORNIER2 [mm] "Connector; Header; 2 Position; screw terminal blocks, Pin Spacing=5.08mm"
  rect 3.2x3.2 hole 1.219: 1(0,0)
  round 3.2 hole 1.219: 2(5.08,0)
  silkscreen extent -2.54,-3.81 7.62,3.81, body extent -3.57,-4.8 8.59,3.8, height 12
BORNIER2_FEM_COUDE [mm] "Connector; Header; 2 Position; Right Angle; Female; Pin Spacing=5.08mm Green"
  rect 3x3 hole 1.219: 1(0,0)
  round 3 hole 1.219: 2(7.62,0)
  silkscreen extent -3.56,-10.03 11.18,2.03
BORNIER_5V_3.81MM [mm]
  rect 2.54x2.54 hole 1.25: 1(-0.025,0)
  round 2.54 hole 1.25: 2(3.81,0) 3(7.62,0) 4(11.43,0) 5(15.24,0)
  silkscreen extent -2.18,-3 17.37,4.2, body extent -2.6,-2.97 17.84,4.28, height 9.22
C0805_N [mm] "Chip Capacitor, Body 2.0x1.3mm, IPC Medium Density"
  rect 1.3x1.5 smd: 1(-0.85,0) 2(0.85,0)
  silkscreen extent -1.8,-0.65 -1.8,0.65, body extent -0.99,-0.63 1.01,0.63, height 0.8
CONDENSATEUR_POLARISE_ELECTROLYTIQUE_RADIAL_5.08/8.9 [mil] "CONDENSATEUR_POLARISE_ELECTROLYTIQUE_RADIAL ; DIAMETRE : 8.9mm ; ESPACEMENT BROCHES : 5.08mm"
  rect 64x64 / inner round 64 / far side round 64 hole 32: 1(0,0)
  round 64 hole 32: 2(200,0)
  silkscreen extent -93,-190 294,197, body extent -93,-188 291,196, height 485
DIO10.46-5.3x2.8 [mil] "Diode, Axial; Body 5.2 x 2.7 mm (LxDia. max), Lead Dia. 0.86 mm (max)"
  round 170 hole 125: 1(-290,-5)
  rect 170x170 hole 125: 2(290,0)
  silkscreen extent -180,-180 180,180
"Goutte Strap_2 Pads_Clearance 0.254mm" [mil] "Goutte Strap_2 Pads_Clearance 0.254mm"
  rect 50x50 smd mask+7.87: 1(0,0) 2(60,0)
  silkscreen extent -35,-35 95,35
"Goutte Strap_3 PADS" [mm] "3 Pads CMS Goutte Strap"
  round 1 smd: 1(-2.5,0) 3(2.5,0)
  rect 2x2 smd: 2(0,0)
  1-TOP region: -1.286,-1 -2.286,-1 -2.669,-0.924 -2.993,-0.707 -3.21,-0.383 -3.286,0 -3.286,0 -3.21,0.383 -2.993,0.707 -2.669,0.924 -2.286,1 -2.286,1 -1.286,1
  1-TOP region: 1.289,1 2.289,1 2.672,0.924 2.996,0.707 3.213,0.383 3.289,0 3.289,0 3.213,-0.383 2.996,-0.707 2.672,-0.924 2.289,-1 2.289,-1 1.289,-1
  4-BOT region: 0,1 0.383,0.924 0.707,0.707 0.924,0.383 1,0 1,0 0.924,-0.383 0.707,-0.707 0.383,-0.924 0,-1 0,-1 -0.383,-0.924 -0.707,-0.707 -0.924,-0.383 -1,0 -1,0 -0.924,0.383 -0.707,0.707 -0.383,0.924 0,1
  silkscreen extent -3.5,-1.25 3.5,1.25
"HE10/16_M_D_B P" [mm] "HE10 ; 16 CONTACTS ; MALE ;  DROIT; BAS PROFIL ; ESPACEMENTS BROCHES = 2.54 mm"
  rect 1.63x2 hole 1.016: 1(0,-2.54)
  oval 1.63x2 hole 1.016: 2(0,0) 3(2.54,-2.54) 4(2.54,0) 5(5.08,-2.54) 6(5.08,0) 7(7.62,-2.54) 8(7.62,0) 9(10.16,-2.54) 10(10.16,0) 11(12.7,-2.54) 12(12.7,0) 13(15.24,-2.54) 14(15.24,0) 15(17.78,-2.54) 16(17.78,0)
  silkscreen extent -5.26,-6 22.86,3.78, body extent -5.1,-5.8 22.72,3.6, height 8.8
LCD_4X20_MIDAS [mm] "MCCOG42005A6W-BNMLWI"
  rect 1x2 hole 0.61: 1(26.53,0)
  oval 1x2 hole 0.61: 2(27.8,0) 3(29.07,0) 4(30.34,0) 5(31.61,0) 6(32.88,0) 7(34.15,0) 8(35.42,0) 9(36.69,0) 10(37.96,0) 11(39.23,0) 12(40.5,0) 13(41.884,0)
  round 4.572 hole 3.175: A(74.3,10.7) K(74.3,25.7)
  silkscreen extent 0,0 74.3,36.4, body extent 0.06,-0.76 74.36,35.64, height 5.93
LED_0805 [mm] "SM LED; 2 Flat Leads"
  rect 1.2x1.2 smd: 1(-1.05,0) 2(1.05,0)
  silkscreen extent -2.05,-1 2.35,1, body extent -1.05,-0.64 1.06,0.64, height 1.2
M3x6mm#1 [mm] "Vis M3 X 6mm _TORX_Tête 6mm"
  round 0.8 hole 0.6: 1(-2.5,0) 1(-1.768,-1.768) 1(-1.768,1.768) 1(0,-2.5) 1(0,2.5) 1(1.768,-1.768) 1(1.768,1.768) 1(2.5,0)
  round 6 hole 3.2: 1(0,0)
  silkscreen extent -3.29,-3.28 3.29,3.28, body extent -2.84,-2.85 2.86,2.85, height 1.67
M3x6mm#2 [mm] "Vis M3 X 6mm _TORX_Tête 6mm"
  round 0.8 hole 0.508: 1(-2.5,0) 1(-1.768,-1.768) 1(-1.768,1.768) 1(0,-2.5) 1(0,2.5) 1(1.768,-1.768) 1(1.768,1.768) 1(2.5,0)
  round 6 hole 3.175: 1(0,0)
  silkscreen extent -3.29,-3.28 3.29,3.28, body extent -2.84,-2.85 2.86,2.85, height 1.67
M3x6mm#3 [mm] "Vis M3 X 6mm"
  round 6 hole 3.175: 1(0,0)
  silkscreen extent -3.29,-3.28 3.29,3.28
PAD_CMS_5.08x2.54 [mil] "Pad pour souder un fil"
  oval 200x100 smd paste+0.2: 1(0,0)
  silkscreen extent -108,-59 109,59, body extent -85,-30 84,30, height 10
PUSHBUTTON_LED_FlecheDroite [mm]
  round 1.6 hole 1.016: 0(2.507,0) 2(5.08,0) 3(0,-5.08) 4(5.08,-5.08) 5(-0.16,-2.54) 6(5.24,-2.54)
  rect 1.6x1.6 hole 1.016: 1(0,0)
  silkscreen extent -2.46,-7.54 7.54,2.46, body extent -2.46,-7.54 7.54,2.46, height 10.02
PUSHBUTTON_LED_FlecheGauche [mm]
  round 1.6 hole 1.016: 0(2.507,0) 2(5.08,0) 3(0,-5.08) 4(5.08,-5.08) 5(-0.16,-2.54) 6(5.24,-2.54)
  rect 1.6x1.6 hole 1.016: 1(0,0)
  silkscreen extent -2.46,-7.54 7.54,2.46, body extent -2.46,-7.54 7.54,2.46, height 10.02
PUSHBUTTON_LED_OK [mm]
  round 1.6 hole 1.016: 0(2.507,0) 2(5.08,0) 3(0,-5.08) 4(5.08,-5.08) 5(-0.16,-2.54) 6(5.24,-2.54)
  rect 1.6x1.6 hole 1.016: 1(0,0)
  silkscreen extent -2.46,-7.54 7.54,2.46, body extent -2.46,-7.54 7.54,2.46, height 10.02
PUSHBUTTON_LED_SET [mm]
  round 1.6 hole 1.016: 0(2.507,0) 2(5.08,0) 3(0,-5.08) 4(5.08,-5.08) 5(-0.16,-2.54) 6(5.24,-2.54)
  rect 1.6x1.6 hole 1.016: 1(0,0)
  silkscreen extent -2.46,-7.54 7.54,2.46, body extent -2.46,-7.54 7.54,2.46, height 10.02
R0805_N [mm] "Chip Resistor, Body 2.0x1.3mm, IPC Medium Density"
  rect 1.2x1.4 smd: 1(-0.9,0) 2(0.9,0)
  silkscreen extent 0,-0.6 0,0.6, body extent -1.07,-0.7 1.07,0.7, height 0.65
R1206_N [mm] "Chip Resistor, Body 3.2x1.6mm, IPC Medium Density"
  rect 1.3x1.8 smd: 1(-1.45,0) 2(1.45,0)
  silkscreen extent -0.4,-0.8 0.4,0.8, body extent -1.68,-0.87 1.68,0.87, height 0.71
RESISTANCE_5W [mil] "RESISTANCE 5W ; DIAMETRE : 8.5mm ; LONGUEUR : 26mm ; PAS : 2mm"
  round 120 hole 60: 1(0,95) 2(0,-100)
  silkscreen extent 70,-185 1315,177, body extent -12,-175 1320,167, height 368
RJ11_6/6 [mm] "Connector; RJ11; 6P/6C; Low Profil; Right Angle; Pin Spacing=2.54mm"
  oval 2.54x2 hole 1.016: 1(0,-5.08) 2(2.54,-3.82) 3(0,-2.54) 4(2.54,-1.27) 5(0,0) 6(2.54,1.27)
  round 4.2 hole 3.302: FIX1(8.89,3.18) FIX2(8.89,-6.98)
  silkscreen extent -1.51,-8.51 16.59,4.7, body extent -2.25,-8.43 17.75,4.57, height 16
SO8_N [mm] "SOIC, 8-Leads, Body 4.9x3.9mm, Pitch 1.27mm, IPC Medium Density"
  oval 2.2x0.6 smd: 1(-2.4,1.905) 2(-2.4,0.635) 3(-2.4,-0.635) 4(-2.4,-1.905) 5(2.4,-1.905) 6(2.4,-0.635) 7(2.4,0.635) 8(2.4,1.905)
  silkscreen extent -2.52,-2.5 0.9,2.88, body extent -2,-2.5 2,2.5, height 1.75
SOT223-4N [mm] "SOT223/SC73, 4-Leads, Body 6.5x3.5mm, Pitch 2.3mm, Lead Span 7mm, IPC Medium Density"
  rect 2.4x1 smd: 1(-2.9,2.3) 2(-2.9,0) 3(-2.9,-2.3)
  rect 2.4x3.3 smd: 4(2.9,0)
  silkscreen extent -3.02,-3.35 1.4,3.47, body extent -3.39,-3.35 3.5,3.35, height 1.8
STM-LQFP100_N [mm] "Thin QFP, 100-Leads, Body 14x14mm, Pitch 0.5mm, IPC Medium Density"
  oval 1.8x0.3 smd: 1(-7.55,6) 2(-7.55,5.5) 3(-7.55,5) 4(-7.55,4.5) 5(-7.55,4) 6(-7.55,3.5) 7(-7.55,3) 8(-7.55,2.5) 9(-7.55,2) 10(-7.55,1.5) 11(-7.55,1) 12(-7.55,0.5) 13(-7.55,0) 14(-7.55,-0.5) 15(-7.55,-1) 16(-7.55,-1.5) 17(-7.55,-2) 18(-7.55,-2.5) 19(-7.55,-3) 20(-7.55,-3.5) 21(-7.55,-4) 22(-7.55,-4.5) 23(-7.55,-5) 24(-7.55,-5.5) 25(-7.55,-6) 51(7.55,-6) 52(7.55,-5.5) 53(7.55,-5) 54(7.55,-4.5) 55(7.55,-4) 56(7.55,-3.5) 57(7.55,-3) 58(7.55,-2.5) 59(7.55,-2) 60(7.55,-1.5) 61(7.55,-1) 62(7.55,-0.5) 63(7.55,0) 64(7.55,0.5) 65(7.55,1) 66(7.55,1.5) 67(7.55,2) 68(7.55,2.5) 69(7.55,3) 70(7.55,3.5) 71(7.55,4) 72(7.55,4.5) 73(7.55,5) 74(7.55,5.5) 75(7.55,6)
  oval 0.3x1.8 smd: 26(-6,-7.55) 27(-5.5,-7.55) 28(-5,-7.55) 29(-4.5,-7.55) 30(-4,-7.55) 31(-3.5,-7.55) 32(-3,-7.55) 33(-2.5,-7.55) 34(-2,-7.55) 35(-1.5,-7.55) 36(-1,-7.55) 37(-0.5,-7.55) 38(0,-7.55) 39(0.5,-7.55) 40(1,-7.55) 41(1.5,-7.55) 42(2,-7.55) 43(2.5,-7.55) 44(3,-7.55) 45(3.5,-7.55) 46(4,-7.55) 47(4.5,-7.55) 48(5,-7.55) 49(5.5,-7.55) 50(6,-7.55) 76(6,7.55) 77(5.5,7.55) 78(5,7.55) 79(4.5,7.55) 80(4,7.55) 81(3.5,7.55) 82(3,7.55) 83(2.5,7.55) 84(2,7.55) 85(1.5,7.55) 86(1,7.55) 87(0.5,7.55) 88(0,7.55) 89(-0.5,7.55) 90(-1,7.55) 91(-1.5,7.55) 92(-2,7.55) 93(-2.5,7.55) 94(-3,7.55) 95(-3.5,7.55) 96(-4,7.55) 97(-4.5,7.55) 98(-5,7.55) 99(-5.5,7.55) 100(-6,7.55)
  silkscreen extent -7.67,-6.25 6.25,6.82, body extent -7,-7 7,7, height 1.6
"SW_UNIPOL_DROIT - APEM 18235" [mil]
  round 120 hole 63: COMMON1(140,250) NC1(140,435.04) NO1(140,64.96)
  silkscreen extent 2,0 278,500, body extent -10,4 285,496, height 449
"Switch 6x6 Vertical" [mm]
  rect 1.6x1.6 hole 1: 1(0,0)
  round 1.6 hole 1: 2(6.5,0) 3(0,-4.5) 4(6.5,-4.5)
  silkscreen extent 1.07,-5.31 5.46,0.86, body extent -0.71,-5.34 7.19,0.86, height 7
TRACO_THN20 [mm] "THN20"
  round 2 hole 1.219: 1(2.54,-15.24) 2(2.54,-10.16) 3(22.987,-22.86) 4(22.86,-12.7) 5(22.86,-2.54) 6(2.54,-2.54)
  silkscreen extent 0,-25.4 25.4,0, body extent -0.06,-25.43 25.41,0, height 9.91

## Part data
12V 12Vin 12Vout 24V_T12 ARU_in ARU_out BAT_24V BAT_GND biroute biroute_gnd Cde_in Cde_out CORDON_24V CORDON_GND GND_12 GND_T12 V1 V2 V3 V4 Vf1 Vf2 Vf3 Vf4: library part "Vis M3 X 6mm _TORX_Tête 6mm", "Vis M3 X 6mm _TORX_Tête 6mm"
12V_FdP 12V_Hokuyo: "Terminal blocks, 2 pins, pitch=5mm"
BP0 BP1 BP2 BP3 BP4 BP5 BPc BPpm BPst: library part SW_Pushbutton_6x6mm_Vertical, "Switch tactil 6mm x 6mm Vertical"
Cd0 Cd1 Cd2 Cd3 Cd4 Cd5 Cd6 Cd7 Cd8 Cd9 Cdlcd CfBP0 CfBP1 CfBP2 CfBP3 CfBP4 CfBP5 CfBPc CfBPpm CfBPst CfSW0 CfSW1 CfSW2 CfSW3 CfSW4 CfSW5 CfSW6 CfSW7 CfSW8 CfSW9 CfSW10 CfSW11 CfSW12 CfSW13 CfSW14 CfSW15 CfSW16 CfSW17 CfSW18 CfSW19 CfSWcolor CfSWlcd CV0 CV1 CV2 CV3 CV4 CVOUT STR_CdCan1 STR_CdCan2 STR_Cu1rx: library part Condensateur, "Capacitor"
Cd3V_1: library part Capacitor, "Capacitor"
Cd24VCDE CdPerm: library part "Condensateur Polarise Traversant", "Polarized Capacitor"
D24in D24Psce Dcde Dperm Led0 Led1 Led2 Led3 Led4 Led5: "Typical LED"
Dcord Dtransil: library part "Diode 1N4001", "1 Amp General Purpose Rectifier"
Dreverse: "1 Amp General Purpose Rectifier"
F1: library part Fusible_SMD, "Fuse"
J5_24V J9_24V J11_24V J14_24V: library part BORNIER2, "Terminal blocks, 2 pins, pitch=5mm"
LCD*: library part LCD_MIDAS_4x20
LED_color: library part "WL-SFTW 3528 150141M173100", "SMD Full-Color Top LED, WL-SFTW, Red & Green & Blue"
R24in R24Psce RBlue Rcde RGreen Rled0 Rled1 Rled2 Rled3 Rled4 Rled5 Rperm RpuBP0 RpuBP1 RpuBP2 RpuBP3 RpuBP4 RpuBP5 RpuBPc RpuBPpm RpuBPst RpuSW0 RpuSW1 RpuSW2 RpuSW3 RpuSW4 RpuSW5 RpuSW6 RpuSW7 RpuSW8 RpuSW9 RpuSW10 RpuSW11 RpuSW12 RpuSW13 RpuSW14 RpuSW15 RpuSW16 RpuSW17 RpuSW18 RpuSW19 RpuSWcolor RpuSWlcd Rred Rretro RsBP0 RsBP1 RsBP2 RsBP3 RsBP4 RsBP5 RsBPc RsBPpm RsBPst RsSW0 RsSW1 RsSW2 RsSW3 RsSW4 RsSW5 RsSW6 RsSW7 RsSW8 RsSW9 RsSW10 RsSW11 RsSW12 RsSW13 RsSW14 RsSW15 RsSW16 RsSW17 RsSW18 RsSW19 RsSWcolor RsSWlcd STR_RdwnWAmI STR_RpuU1rx STR_RpuU1tx STR_Rsu1rx STR_RsU1tx STR_RupWAmI: library part Resistor, "Resistor"
STM32: "ARM Cortex-M4 32-bit MCU+FPU, 210 DMIPS, 1024 kB Flash, 192 kB Internal RAM, 82 I/Os, 100-pin LQFP, -40 to 85 degC, Tray"
STR_UART1: "Right Angle, Standard Profile, Offset Latch DECconnect, Flangeless PCB Jack"
STR_Ucan: "High-Speed CAN Transceiver, 8-Pin SOIC, Industrial Temperature"
SW0 SW1 SW2 SW3 SW4 SW5 SW6 SW7 SW8 SW9 SW10 SW11 SW12 SW13 SW14 SW15 SW16 SW17 SW18 SW19 SWcolor SWlcd: library part "SW SPDT- APEM Série 523x", "Switch unipolaire a levier"
TR_5V: "Traco 20W 24V to 5V*4A"
Ureg_3V: "1000 mA, Low Voltage, Low Quiescent Current LDO Regulator, 3-Pin SOT-223, Extended Temperature"

## Free pads (board coordinates)
  oval 70x110 hole 50: 0(8364.57,8149.61) 0(8564.57,8149.61) 0(10726.93,8149.61) 0(10926.93,8149.61)

## Via types
v1: diameter 50, hole 20, 1-TOP to 4-BOT, 82 vias
v2: diameter 25.98, hole 12.99, 1-TOP to 4-BOT, tented both sides, 8 vias

## Nets (pads, with @x,y where several pads share a name; then routed paths per layer and width w, separated by ;. In a path a pad name is that pad's centre, name@x,y a point inside that pad or via, vN(x,y) a via of type N, cw(c..) or ccw(c..) an arc to the next point about the centre after c; other vN are vias at no path point)
3V: RpuBP0.2 RpuBP1.2 RpuBP2.2 RpuBP3.2 RpuBP4.2 RpuBP5.2 RpuBPc.2 RpuBPpm.2 RpuBPst.2 RpuSW0.2 RpuSW1.2 RpuSW2.2 RpuSW3.2 RpuSW4.2 RpuSW5.2 RpuSW6.2 RpuSW7.2 RpuSW8.2 RpuSW9.2 RpuSW10.2 RpuSW11.2 RpuSW12.2 RpuSW13.2 RpuSW14.2 RpuSW15.2 RpuSW16.2 RpuSW17.2 RpuSW18.2 RpuSW19.2 RpuSWcolor.2 RpuSWlcd.2 STR_RpuU1rx.2 STR_RpuU1tx.2 Yahourt.3
3V3: Cd0.2 Cd1.2 Cd2.2 Cd3.2 Cd3V_1.2 Cd4.2 Cd5.2 Cd6.2 Cd7.2 Cd8.2 Cd9.2 STM32.6 STM32.11 STM32.19 STM32.21 STM32.22 STM32.28 STM32.50 STM32.75 STM32.100 Ureg_3V.3
3V_STR: FdP.3 STR_RupWAmI.2
5V: Cde_out.1 Cdlcd.1 FdP_pwr.5 LCD*.8 LCD*.10 LED_color.1 Rretro.2 STR_CdCan1.2 STR_CdCan2.2 STR_Ucan.3 Ureg_3V.1 Yahourt.2 | length 4390.4
  1-TOP w25: LED_color.1@9587.22,7922.15 LED_color.1@9589.37,7920
  1-TOP w50: 9019.37,9155 9019.37,9135 ; 9542.5,7922.5 9485,7980 9255,7980 9180,8055 9180,8915 9019.37,9075.63 9019.37,9135 ; v1(9894.37,8580) 9894.37,8755 ; 10314.37,8755 v1@10366.87,8702.5 ; 10314.37,8760 9394.37,8760 9019.37,9135
  3-SIGNAL w30: 9015,9150.63 9019.37,9155
  3-SIGNAL w50: v1@10364.37,8700 v1(10369.37,8700) v1@11034.37,8700
  4-BOT w25: LCD*.8 9693.31,8341.06 9704.37,8330 9764.37,8330 9794.37,8360 LCD*.10@9794.37,8405 ; LCD*.10 9793.31,8433.94 9879.37,8520 Cdlcd.1@9879.37,8570
  other v1: 11039.37,8700
5V_STR: FdP.2
5VCDE: Rcde.1
5VPERM: Cde_in.1 CdPerm.1 FdP_pwr.4 Rperm.1 TR_5V.3
12V: 12Vout.1 F1.1
12VIN: 12V.1 12V_FdP.1 12Vin.1
24VCORDON: CORDON_24V.1 Dcord.1
24VPERM: ARU_in.1 BAT_24V.1 Dcord.2 Dreverse.1 R24in.1
24VPSCE: 24V_T12.1 ARU_out.1 FdP_pwr.2 J5_24V.2 J9_24V.2 J11_24V.2 J14_24V.2 R24Psce.1
CANH: FdP.15 STR_Ucan.7 Yahourt.15
CANL: FdP.16 STR_Ucan.6 Yahourt.16
GND: biroute_gnd.1 BP0.1 BP1.1 BP2.1 BP3.1 BP4.1 BP5.1 BP_LCD+.3 BP_LCD+.4 BP_LCD+.6 BP_LCD-.3 BP_LCD-.4 BP_LCD-.6 BP_LCD_OK.3 BP_LCD_OK.4 BP_LCD_OK.6 BP_Set.3 BP_Set.4 BP_Set.6 BPc.1 BPpm.1 BPst.1 Cd0.1 Cd1.1 Cd2.1 Cd3.1 Cd3V_1.1 Cd4.1 Cd5.1 Cd6.1 Cd7.1 Cd8.1 Cd9.1 Cdlcd.2 CdPerm.2 CfBP0.1 CfBP1.1 CfBP2.1 CfBP3.1 CfBP4.1 CfBP5.1 CfBPc.1 CfBPpm.1 CfBPst.1 CfSW0.1 CfSW1.1 CfSW2.1 CfSW3.1 CfSW4.1 CfSW5.1 CfSW6.1 CfSW7.1 CfSW8.1 CfSW9.1 CfSW10.1 CfSW11.1 CfSW12.1 CfSW13.1 CfSW14.1 CfSW15.1 CfSW16.1 CfSW17.1 CfSW18.1 CfSW19.1 CfSWcolor.1 CfSWlcd.1 CV0.2 CV1.2 CV2.2 CV3.2 CV4.2 CVOUT.2 FdP.1 FdP.4 FdP_pwr.3 LCD*.9 LCD*.11 LCD*.K Rled0.1 Rled1.1 Rled2.1 Rled3.1 Rled4.1 Rled5.1 STM32.10 STM32.20 STM32.27 STM32.74 STM32.99 STR_CdCan1.1 STR_CdCan2.1 STR_Cu1rx.1 STR_RdwnWAmI.1 STR_UART1.5 STR_UART1.6 STR_Ucan.2 STR_Ucan.8 SW0.COMMON1 SW1.COMMON1 SW2.COMMON1 SW3.COMMON1 SW4.COMMON1 SW5.COMMON1 SW6.COMMON1 SW7.COMMON1 SW8.COMMON1 SW9.COMMON1 SW10.COMMON1 SW11.COMMON1 SW12.COMMON1 SW13.COMMON1 SW14.COMMON1 SW15.COMMON1 SW16.COMMON1 SW17.COMMON1 SW18.COMMON1 SW19.COMMON1 SWcolor.COMMON1 SWlcd.COMMON1 TR_5V.5 Ureg_3V.2 Ureg_3V.4 V1.1 V2.1 V3.1 V4.1 Vf1.1 Vf2.1 Vf3.1 Vf4.1 Yahourt.1 Yahourt.4 | length 745.9
  4-BOT w20: CVOUT.2 CV0.2 CV1.2 CV2.2 CV3.2 CV4.2 9747.83,8640 v1@9814.37,8640
  4-BOT w25: LCD*.9 9743.31,8453.94 9814.37,8525 v1@9814.37,8645
  other v1: 9860,7920 8145,7930 10584.37,7935 10124.37,7950 9645,8080 11155,8265 10099.37,8285 9614.37,8305 9095,8340 8125,8365 10339.37,8445 8830,8455 8454.37,8465 9100,8465 10120,8475 8645,8570 11294.37,8615 10824.37,8620 9269.37,8640 9829.37,8640 9754.37,8645 8420,8665 8999.37,8670 10289.37,8680 8859.37,8685 9804.37,8685 10164.37,8690 8255,8710 10949.37,8790 8635,8795 10639.37,8810 10295,8840 8480,8850 9740,8855 10025,8855 9105,8890 8950,8895 9305,8965 9600,8970 10160,8970 8910,9060 9330,9060 8635,9065 10984.37,9175 10470,9255 8404.37,9270 11360,9295 9155,9330 9765,9345 8389.37,9430 10319.37,9455 10374.37,9455 10429.37,9455 9030,9475 9179.37,9500 10344.37,9500 10404.37,9500 10989.37,9520 8399.37,9740 8874.37,9890
GND_5: Dcde.2 Dperm.2 STgnd.2
GND_12: 12V_FdP.2 12V_Hokuyo.2 Dtransil.1 GND_12.1
GND_24: BAT_GND.1 Cd24VCDE.2 CORDON_GND.1 D24in.2 D24Psce.2 FdP_pwr.1 GND_T12.1 J5_24V.1 J9_24V.1 J11_24V.1 J14_24V.1 STgnd.1 TR_5V.2
LCD_SCL: LCD*.12 st_lcd_scl.2 | length 946.6
  4-BOT w16: 10069.37,8610 10069.37,9210
  4-BOT w20: LCD*.12 9893.31,8433.94 10069.37,8610 ; 10069.37,9210 10114.37,9255
  other v2: 12430.32,13046.69 12461.81,13046.69 12430.32,13078.19 12461.81,13078.19
LCD_SDA: LCD*.13 st_lcd_sda.2 | length 814
  4-BOT w20: LCD*.13 10114.37,8566.57 10114.37,9145
  other v2: 12556.61,13046.69 12588.11,13046.69 12556.61,13078.19 12588.11,13078.19
Net12V_Hokuyo_1: 12V_Hokuyo.1 Dtransil.2 F1.2
NetBP0_3: BP0.3 RpuBP0.1 RsBP0.1
NetBP1_3: BP1.3 RpuBP1.1 RsBP1.1
NetBP2_3: BP2.3 RpuBP2.1 RsBP2.1
NetBP3_3: BP3.3 RpuBP3.1 RsBP3.1
NetBP4_3: BP4.3 RpuBP4.1 RsBP4.1
NetBP5_3: BP5.3 RpuBP5.1 RsBP5.1
NetBPc_3: BPc.3 RpuBPc.1 RsBPc.1
NetBPpm_3: BPpm.3 RpuBPpm.1 RsBPpm.1
NetBPst_3: BPst.3 RpuBPst.1 RsBPst.1
NetCd24VCDE_1: Cd24VCDE.1 Dreverse.2 TR_5V.1
NetCV0_1: CV0.1 LCD*.3 | length 179.9
  4-BOT w20: CV0.1@9419.37,8570 9443.31,8546.06 LCD*.3
NetCV1_1: CV1.1 LCD*.4 | length 163.9
  4-BOT w20: LCD*.4 CV1.1@9493.31,8563.94
NetCV2_1: CV2.1 LCD*.5 | length 182.9
  4-BOT w20: LCD*.5 9543.31,8468.94 9574.37,8500 CV2.1@9574.37,8570
NetCV3_1: CV3.1 LCD*.6 | length 197.4
  4-BOT w20: LCD*.6 9593.31,8438.94 9659.37,8505 CV3.1@9659.37,8570
NetCV4_1: CV4.1 LCD*.7 | length 214.8
  4-BOT w20: LCD*.7 9643.31,8433.94 9739.37,8530 CV4.1@9739.37,8575
NetCVOUT_1: CVOUT.1 LCD*.2 | length 191.1
  4-BOT w20: CVOUT.1@9354.37,8575 9354.37,8525 9393.31,8486.06 LCD*.2
NetD24in_1: D24in.1 R24in.2
NetD24Psce_1: D24Psce.1 R24Psce.2
NetDcde_1: Dcde.1 Rcde.2
NetDperm_1: Dperm.1 Rperm.2
NetLCD*_A: LCD*.A Rretro.1 | length 144
  4-BOT w50: Rretro.1 11214.37,8757.91 LCD*.A@11214.37,8820
NetLed0_2: Led0.2 Rled0.2
NetLed1_2: Led1.2 Rled1.2
NetLed2_2: Led2.2 Rled2.2
NetLed3_2: Led3.2 Rled3.2
NetLed4_2: Led4.2 Rled4.2
NetLed5_2: Led5.2 Rled5.2
NetLED_color_2: LED_color.2 RBlue.2 | length 2527.3
  3-SIGNAL w20: 9119.37,9255 9034.37,9340 8880,9340 8715,9175 8715,8220 8760,8175 8760,8040 8810,7990 v1@9605,7990
  other v1: 9605,7985
NetLED_color_3: LED_color.3 Rred.2 | length 1847
  1-TOP w25: LED_color.3@9702.22,7922.15 LED_color.3@9704.37,7920 ; LED_color.3 9744.9,7924.9 v1@9765,7945
  4-BOT w20: 9219.37,9155 9219.37,9154.37 9180,9115 9180,8015 9255,7940 v1@9770,7940
  other v1: 9780,7950
NetLED_color_4: LED_color.4 RGreen.2 | length 3813.9
  3-SIGNAL w16: 9269.37,9210 9269.37,9300
  3-SIGNAL w20: 9269.37,9210 9319.37,9160 9319.37,9155 ; 9269.37,9300 9169.37,9400 8845,9400 8185,8740 8185,8095 8345,7935 9645,7935 v1@9700,7990
  other v1: 9705,7990
NetRpuSW0_1: RpuSW0.1 RsSW0.1 SW0.NC1
NetRpuSW1_1: RpuSW1.1 RsSW1.1 SW1.NC1
NetRpuSW2_1: RpuSW2.1 RsSW2.1 SW2.NC1
NetRpuSW3_1: RpuSW3.1 RsSW3.1 SW3.NC1
NetRpuSW4_1: RpuSW4.1 RsSW4.1 SW4.NC1
NetRpuSW5_1: RpuSW5.1 RsSW5.1 SW5.NC1
NetRpuSW6_1: RpuSW6.1 RsSW6.1 SW6.NC1
NetRpuSW7_1: RpuSW7.1 RsSW7.1 SW7.NC1
NetRpuSW8_1: RpuSW8.1 RsSW8.1 SW8.NC1
NetRpuSW9_1: RpuSW9.1 RsSW9.1 SW9.NC1
NetRpuSW10_1: RpuSW10.1 RsSW10.1 SW10.NC1
NetRpuSW11_1: RpuSW11.1 RsSW11.1 SW11.NC1
NetRpuSW12_1: RpuSW12.1 RsSW12.1 SW12.NC1
NetRpuSW13_1: RpuSW13.1 RsSW13.1 SW13.NC1
NetRpuSW14_1: RpuSW14.1 RsSW14.1 SW14.NC1
NetRpuSW15_1: RpuSW15.1 RsSW15.1 SW15.NC1
NetRpuSW16_1: RpuSW16.1 RsSW16.1 SW16.NC1
NetRpuSW17_1: RpuSW17.1 RsSW17.1 SW17.NC1
NetRpuSW18_1: RpuSW18.1 RsSW18.1 SW18.NC1
NetRpuSW19_1: RpuSW19.1 RsSW19.1 SW19.NC1
NetRpuSWcolor_1: RpuSWcolor.1 RsSWcolor.1 SWcolor.NC1
NetRpuSWlcd_1: RpuSWlcd.1 RsSWlcd.1 SWlcd.NC1
NetSTR_RpuU1tx_1: STR_RpuU1tx.1 STR_RsU1tx.1 STR_UART1.3
NetSTR_Rsu1rx_2: STR_Rsu1rx.2 STR_UART1.4
PA0_BP_SELFTEST: CfBPst.2 RsBPst.2 STM32.23
PA1_BP_CALIBRATION: CfBPc.2 RsBPc.2 STM32.24
PA3_BP_PRINT_MATCH: CfBPpm.2 RsBPpm.2 STM32.26
PA4_BP0: CfBP0.2 RsBP0.2 STM32.29
PA7_BP1: CfBP1.2 RsBP1.2 STM32.32
PA9_BP2: CfBP2.2 RsBP2.2 STM32.68
PA10_BP3: CfBP3.2 RsBP3.2 STM32.69
PA11_BP4: CfBP4.2 RsBP4.2 STM32.70
PA12_BP5: CfBP5.2 RsBP5.2 STM32.71
PB0_SW_LCD: CfSWlcd.2 RsSWlcd.2 STM32.35
PB1_BP_OK: BP_LCD_OK.1 STM32.36 | length 1127.3
  3-SIGNAL w16: 9969.37,9105 9969.37,9205
  3-SIGNAL w25: 9919.37,9255 9969.37,9205 ; 9969.37,9100.63 9969.37,8810 10224.37,8555 10224.37,8285 BP_LCD_OK.1@10249.37,8260
PB2_BP_+: BP_LCD+.1 STM32.37 | length 1338.5
  3-SIGNAL w16: 9869.37,9080 9869.37,9080.63 9869.37,9205
  3-SIGNAL w20: BP_LCD+.1@9784.37,8260 9829.37,8305 10029.37,8305 10074.37,8350 10074.37,8580 9869.37,8785 9869.37,9080.63
  3-SIGNAL w25: 9819.37,9255 9869.37,9205
PB4_PB_-: BP_LCD-.1 STM32.90 | length 1276.4
  3-SIGNAL w16: 9769.37,9030 9769.37,9205
  3-SIGNAL w25: BP_LCD-.1@9309.37,8255 9279.37,8285 9279.37,8484.37 9770,8975 9770,9070 ; 9719.37,9255 9769.37,9205
PB5_BP_SET: BP_Set.1 STM32.91 | length 1360.4
  3-SIGNAL w16: 9669.37,9114.37 9669.37,9205
  3-SIGNAL w25: BP_Set.1@8839.37,8260 8839.37,8284.37 9669.37,9114.37 9670,9115 ; 9619.37,9255 9669.37,9205
PB6_U1TX: STM32.92 STR_RsU1tx.2
PB7_U1RX: STM32.93 STR_Cu1rx.2 STR_RpuU1rx.1 STR_Rsu1rx.1
PB9_LCD_RESET: LCD*.1 STM32.96 | length 1331.6
  4-BOT w20: LCD*.1@9344.37,8410 9224.37,8530 9224.37,8669.37 9605,9050 9959.37,9050 10019.37,9110 10019.37,9155
PB10_LCD_SCL: st_lcd_scl.3 STM32.47
PB11_LCD_SDA: st_lcd_sda.3 STM32.48
PB12_LED_OK: BP_LCD_OK.5 STM32.51 | length 1184
  3-SIGNAL w25: 9919.37,9095 9919.37,9134.37 ; 9919.37,9155 9919.37,9134.37 ; BP_LCD_OK.5@10244.37,8145 10169.37,8220 10169.37,8550 9919.37,8800 9919.37,9134.37
PB13_LED_+: BP_LCD+.5 STM32.52 | length 1435.2
  3-SIGNAL w20: BP_LCD+.5@9774.37,8150 9739.37,8150 9689.37,8200 9689.37,8285 9739.37,8335 9999.37,8335 10029.37,8365 10029.37,8560 9819.37,8770 ; 9819.37,8775.63 9819.37,9155
PB14_LED_-: BP_LCD-.5 STM32.53 | length 1262.6
  3-SIGNAL w25: BP_LCD-.5@9304.37,8140 9219.37,8225 9219.37,8499.37 9720,9000 9720,9060 ; 9719.37,9055 9719.37,9155
PB15_LED_+: BP_Set.5 STM32.54 | length 1384.3
  3-SIGNAL w20: 8769.37,8304.37 8769.37,8215 BP_Set.5@8829.37,8155
  3-SIGNAL w25: 8769.37,8304.37 9500.31,9035.31 ; 9495,9030 9619.37,9155
PC1_SW16: CfSW16.2 RsSW16.2 STM32.16
PC2_SW17: CfSW17.2 RsSW17.2 STM32.17
PC3_SW18: CfSW18.2 RsSW18.2 STM32.18
PC4_SW19: CfSW19.2 RsSW19.2 STM32.33
PC5_SW2: CfSW2.2 RsSW2.2 STM32.34
PC13_WHO_AM_I: STM32.7 STR_RdwnWAmI.2 STR_RupWAmI.1
PD0_CANRX: STM32.81 STR_Ucan.4
PD1_CANTX: STM32.82 STR_Ucan.1
PD2_LED_GREEN: RGreen.1 STM32.83
PD3_LED_RED: Rred.1 STM32.84
PD4__LED_BLUE: RBlue.1 STM32.85
PD6_SW_COLOR: CfSWcolor.2 RsSWcolor.2 STM32.87
PD7_BIROUTE: biroute.1 STM32.88 | length 284.2
  4-BOT w50: 9519.37,9255 9519.37,9320 biroute.1@9674.37,9475
PD10_LED0: Led0.1 STM32.57
PD11_LED1: Led1.1 STM32.58
PD12_LED2: Led2.1 STM32.59
PD13_LED3: Led3.1 STM32.60
PD14_LED4: Led4.1 STM32.61
PD15_LED5: Led5.1 STM32.62
PE0_SW0: CfSW0.2 RsSW0.2 STM32.97
PE1_SW1: CfSW1.2 RsSW1.2 STM32.98
PE3_SW3: CfSW3.2 RsSW3.2 STM32.2
PE4_SW4: CfSW4.2 RsSW4.2 STM32.3
PE5_SW5: CfSW5.2 RsSW5.2 STM32.4
PE6_SW6: CfSW6.2 RsSW6.2 STM32.5
PE7_SW7: CfSW7.2 RsSW7.2 STM32.38
PE8_SW8: CfSW8.2 RsSW8.2 STM32.39
PE9_SW9: CfSW9.2 RsSW9.2 STM32.40
PE10_SW10: CfSW10.2 RsSW10.2 STM32.41
PE11_SW11: CfSW11.2 RsSW11.2 STM32.42
PE12_SW12: CfSW12.2 RsSW12.2 STM32.43
PE13_SW13: CfSW13.2 RsSW13.2 STM32.44
PE14_SW14: CfSW14.2 RsSW14.2 STM32.45
PE15_SW15: CfSW15.2 RsSW15.2 STM32.46
STR_LCD_SCL: FdP.14 st_lcd_scl.1
STR_LCD_SDA: FdP.7 st_lcd_sda.1
STR_PA2_XBEE_TX: FdP.5 Yahourt.5
STR_PA3_XBEE_RX: FdP.6 Yahourt.6
STR_PA5_RF_XBEE_RESET: FdP.8 FdP.10 Yahourt.8 Yahourt.10
STR_PA6_RF_CONFIG: FdP.11 Yahourt.11
STR_PC8_SYNCHROBALISE: FdP.13 Yahourt.13
STR_PD8_RF_TX: FdP.9 Yahourt.9
STR_PD9_RF_RX: FdP.12 Yahourt.12
pads on no net: BP0.2 BP0.4 BP1.2 BP1.4 BP2.2 BP2.4 BP3.2 BP3.4 BP4.2 BP4.4 BP5.2 BP5.4 BP_LCD+.0 BP_LCD+.2 BP_LCD-.0 BP_LCD-.2 BP_LCD_OK.0 BP_LCD_OK.2 BP_Set.0 BP_Set.2 BPc.2 BPc.4 BPpm.2 BPpm.4 BPst.2 BPst.4 STM32.1 STM32.8 STM32.9 STM32.12 STM32.13 STM32.14 STM32.15 STM32.25 STM32.30 STM32.31 STM32.49 STM32.55 STM32.56 STM32.63 STM32.64 STM32.65 STM32.66 STM32.67 STM32.72 STM32.73 STM32.76 STM32.77 STM32.78 STM32.79 STM32.80 STM32.86 STM32.89 STM32.94 STM32.95 STR_UART1.1 STR_UART1.2 STR_UART1.FIX1 STR_UART1.FIX2 STR_Ucan.5 SW0.NO1 SW1.NO1 SW2.NO1 SW3.NO1 SW4.NO1 SW5.NO1 SW6.NO1 SW7.NO1 SW8.NO1 SW9.NO1 SW10.NO1 SW11.NO1 SW12.NO1 SW13.NO1 SW14.NO1 SW15.NO1 SW16.NO1 SW17.NO1 SW18.NO1 SW19.NO1 SWcolor.NO1 SWlcd.NO1 TR_5V.4 TR_5V.6 Yahourt.7 Yahourt.14
copper on no net: | length 5094.1
  3-SIGNAL w25: 10019.37,9255 10019.37,9300 10049.37,9330 10149.37,9330 10219.37,9260 10219.37,8670 10625,8264.37 10625,8225 10710,8140
  3-SIGNAL w30: 8644.37,8150.63 8645,8151.26 ; v1(8765,8370) 8765,8790 9119.37,9144.37
  4-BOT w16: 9430,9160 9469.37,9199.37 9469.37,9460
  4-BOT w20: 9469.37,9460 9634.37,9625 9704.37,9625
  4-BOT w30: 8564.57,8149.61 8604.61,8149.61 8660,8205 ; 8661.42,8149.61 8661.42,8266.42 v1@8760,8365
  4-BOT w50: 9319.37,9255 9319.37,9580 9664.37,9925 9724.37,9925 ; 9419.37,9260 9419.37,9560 9649.37,9790 9719.37,9790
  other v1: 10319.37,9610 10374.37,9610 10429.37,9610 10344.37,9655 10404.37,9655 10319.37,9765 10374.37,9765 10429.37,9765 10344.37,9810 10404.37,9810 10314.37,9915 10369.37,9915 10424.37,9915 10344.37,9965 10404.37,9965

## Polygon pours and split planes (outlines as drawn)
GND on 1-TOP "1-GND" (solid, shelved, pour order 1003): 7900.69,10015 11395,10015 11395,7902.31 7900.69,7902.31
GND on 2-GND "2-GND" (solid, shelved, pour order 1002): 7900.69,10015 11395,10015 11395,7902.31 7900.69,7902.31
GND on 3-SIGNAL "3-GND" (solid, shelved, pour order 1001): 7900.69,10015 11395,10015 11395,7902.31 7900.69,7902.31
GND on 4-BOT "4-GND" (solid, shelved, pour order 1000): 7900.69,10015 11395,10015 11395,7902.31 7900.69,7902.31

## Keep-outs
Keep-Out Layer:
  the board outline again, w20

## Silkscreen, mask and mechanical layers (free items; w line width, h text height)
Top Overlay:
  text "2014" at 7980,8855 h120 r90
  text "ROBOT ESEO" at 7980,8305 h120 r90
  text "CARTE IHM" at 8085,8305 h120 r90
  text "Menu" at 10725,7925 h120
  text "couleur" at 8320,7920 h120
Bottom Overlay:
  text "Print_Match" at 9564.37,9910 h120
  text "Selftest" at 9564.37,9760 h120
  text "Calibration" at 9564.37,9600 h120
  text "Biroute" at 9564.37,9450 h120

## Dimensions
11417.32,7874.02 to 9947.8,8400 on Mechanical 15
7874.02,10039.37 to 8031.5,9881.89 on Mechanical 15
8031.5,9881.89 to 7874.02,10039.37 on Mechanical 15
11417.32,10039.37 to 11417.32,7874.02 on Mechanical 15
11417.32,10039.37 to 7874.02,10039.37 on Mechanical 15
8031.5,8110.24 to 7874.02,7874.02 on Mechanical 15
8031.5,8110.24 to 7874.02,7874.02 on Mechanical 15
8031.5,8110.24 to 7421.05,8720.68 on Mechanical 15

## Text inside footprints (layer, text, board x,y; h text height)
BP_LCD+: Top Overlay "->" at 9833.07,8039.61 h60
BP_LCD-: Top Overlay "<-" at 9360.63,8039.61 h60
BP_LCD_OK: Top Overlay "OK" at 10305.51,8039.61 h60
BP_Set: Top Overlay "SET" at 8863.19,8034.61 h60
CdPerm: Bottom Overlay "+" at 9519.8,13567.24 h45 r270
TR_5V: Top Overlay "+Vout" at 12829.37,7145 h60; Top Overlay "-Vout" at 12829.37,7770 h60; Top Overlay "+Vin" at 12309.37,7335 h60; Top Overlay "-Vin" at 12309.37,7545 h60; Top Overlay "THN20" at 12179.37,7020 h60; Top Overlay "ON/OFF" at 12329.37,7845 h60; Top Overlay "trim" at 12729.37,7445 h60